# Altium PCB new.PcbDoc (part 1 of 2)
Units mil, origin at the board's own origin, x right, y up, seen from the top; angles counter-clockwise.
Board outline 2755.91 x 2755.91 mil, 4 copper layers (Top Layer, Power Plane, Ground Plane, Bottom Layer), stack 61.12 mil thick; 162 components, 148 nets, 888 pads, 434 vias.
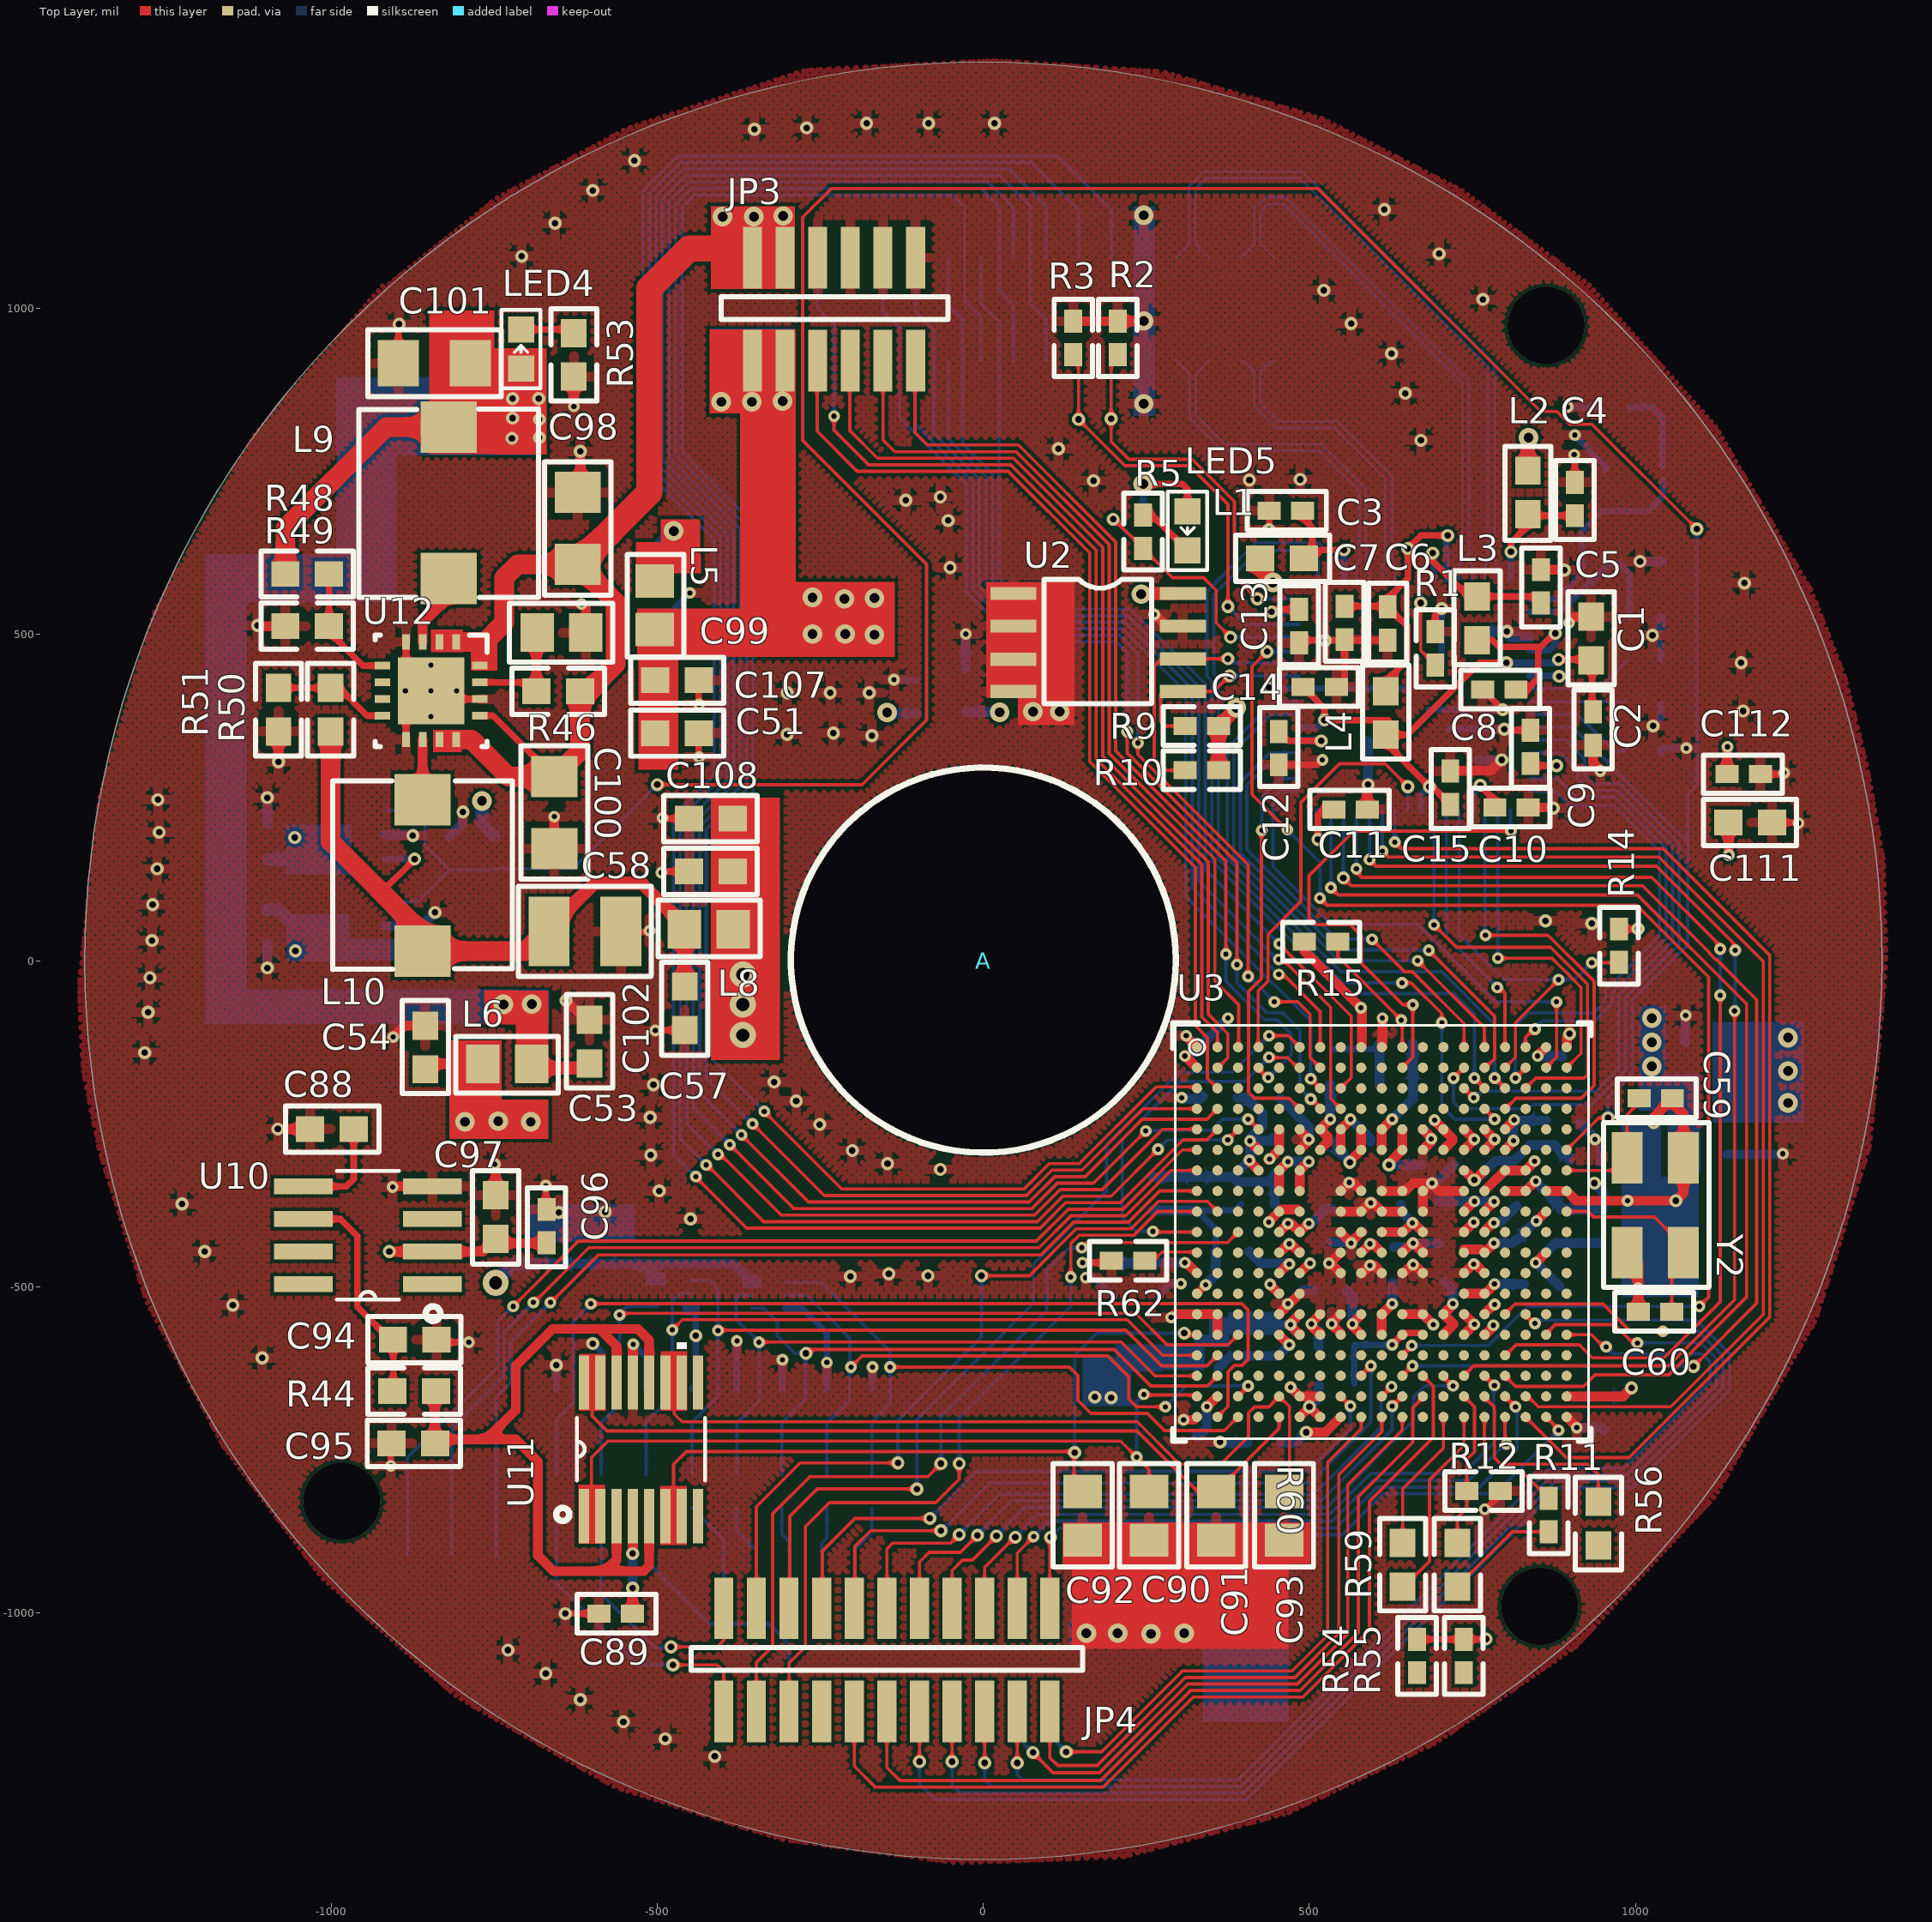
[diagram p0: Top Layer view]
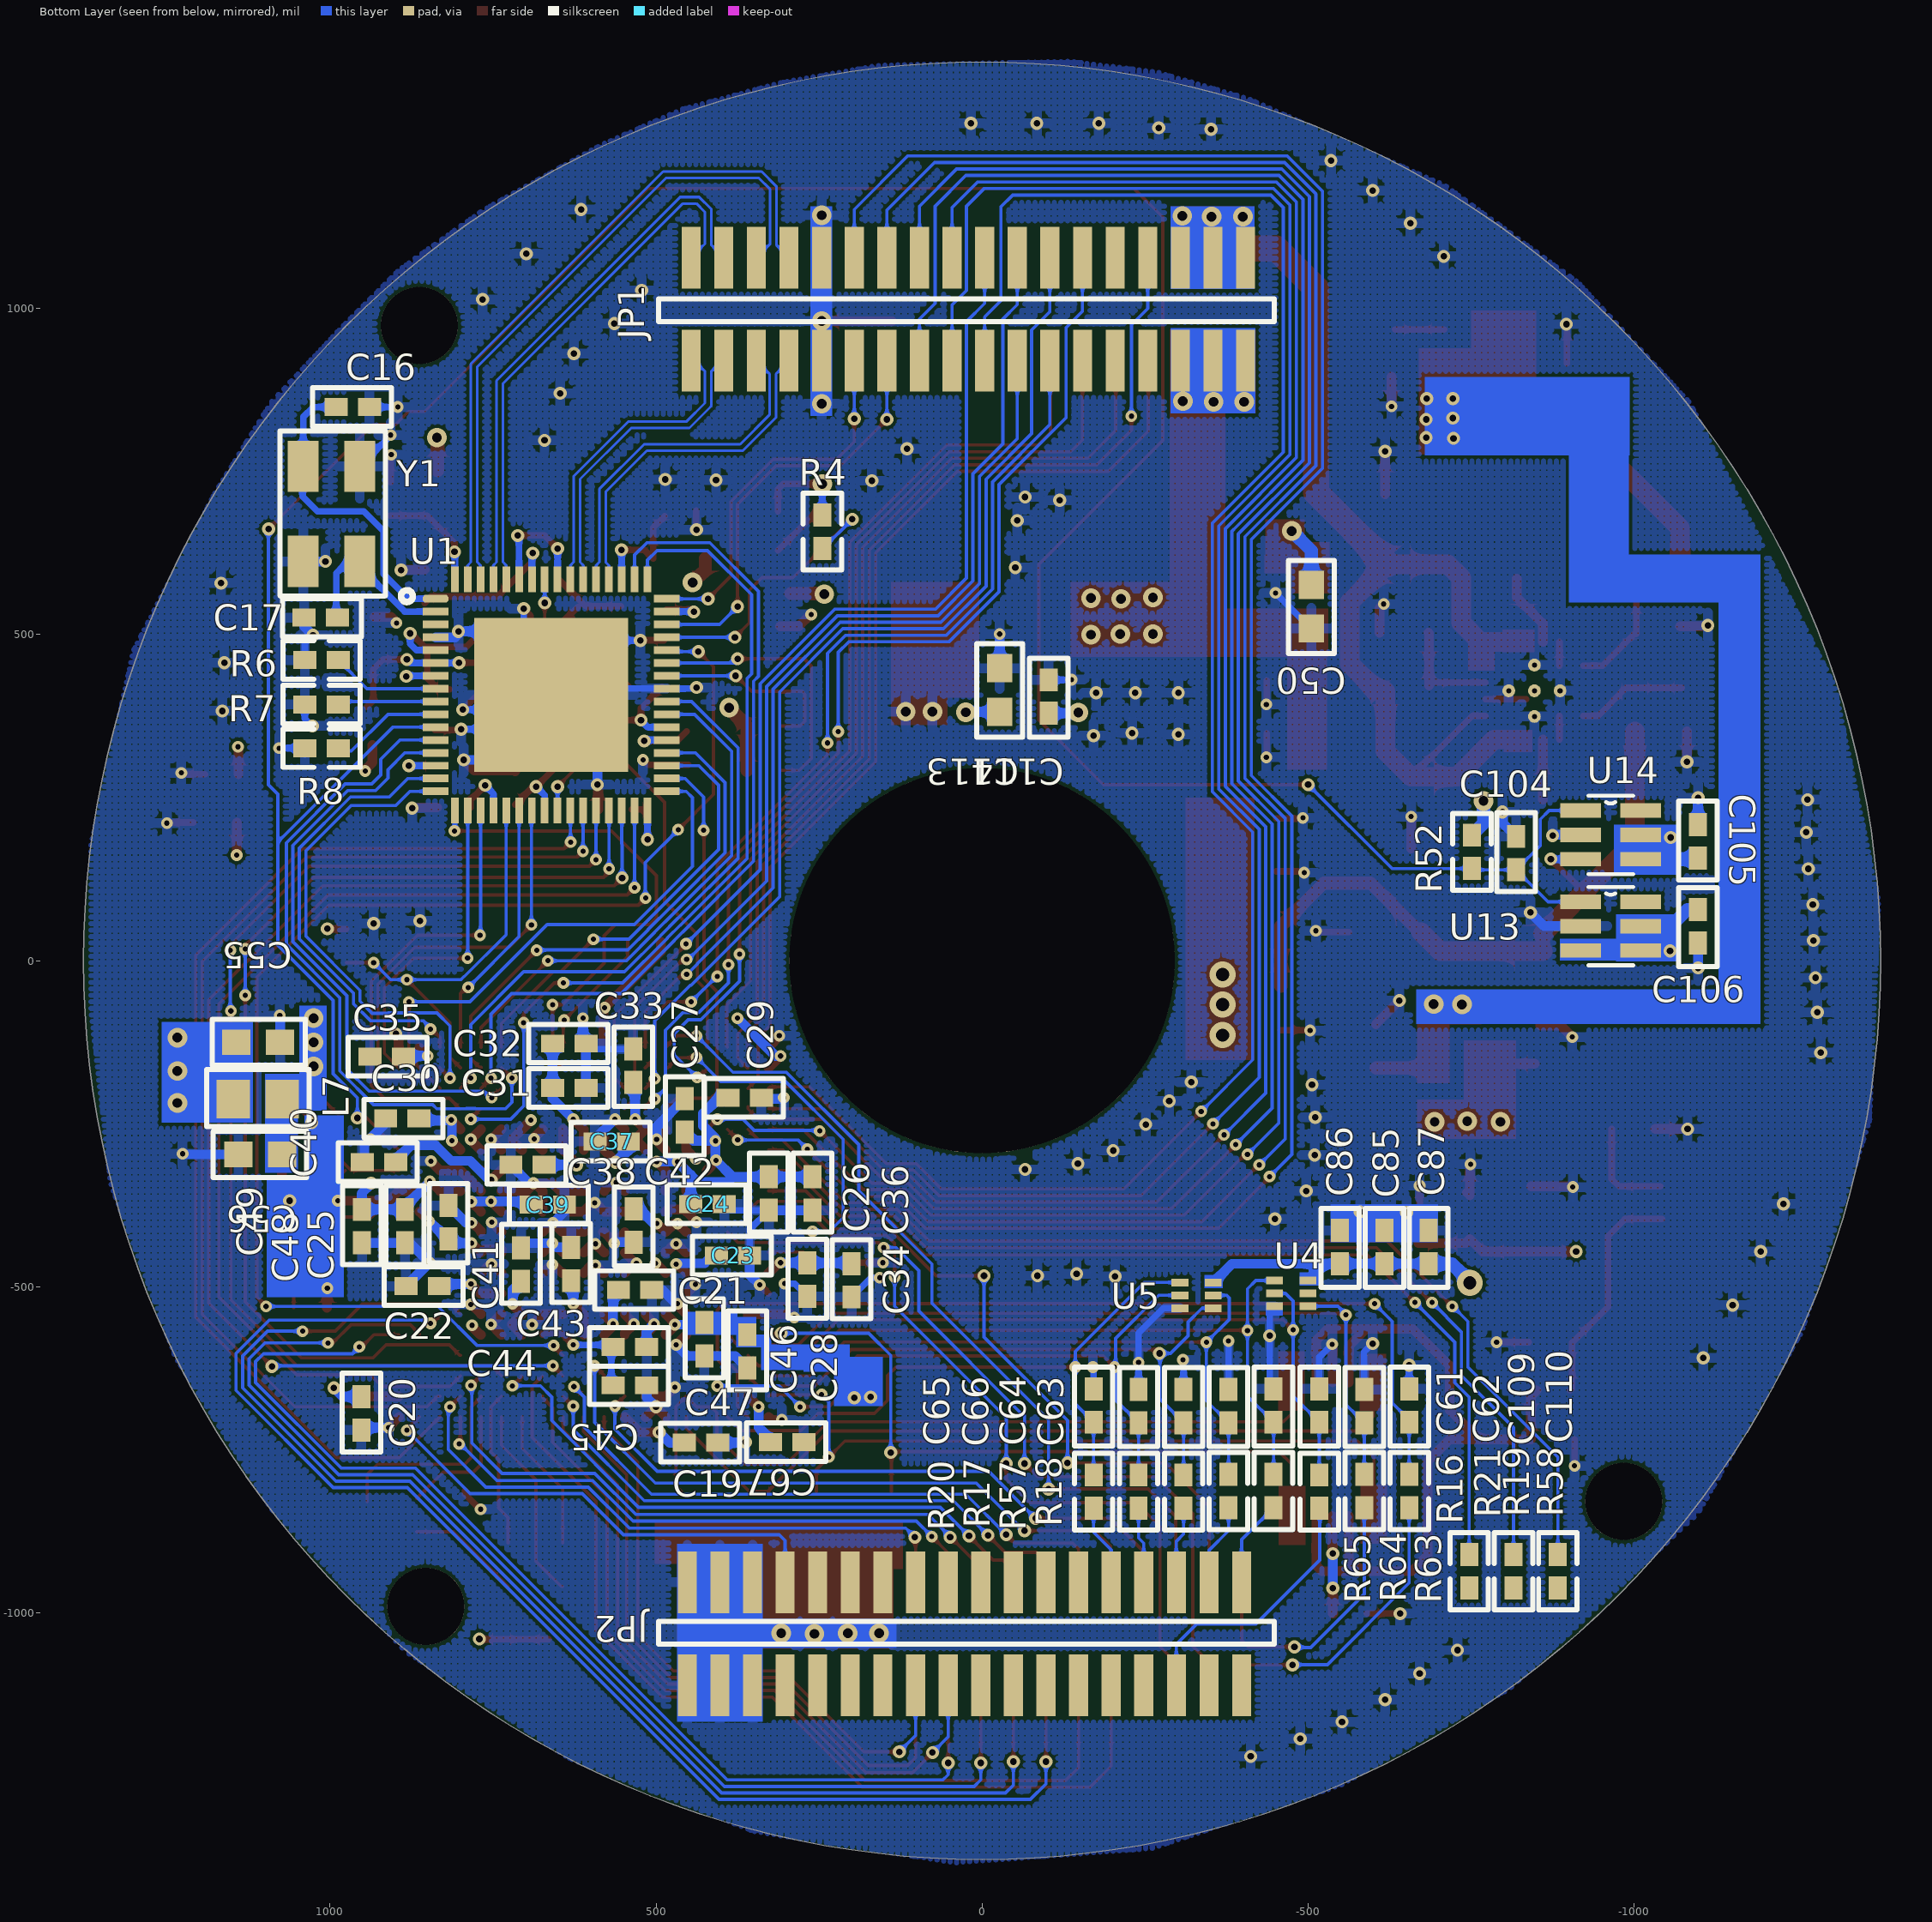
[diagram p1: Bottom Layer view, seen from below]
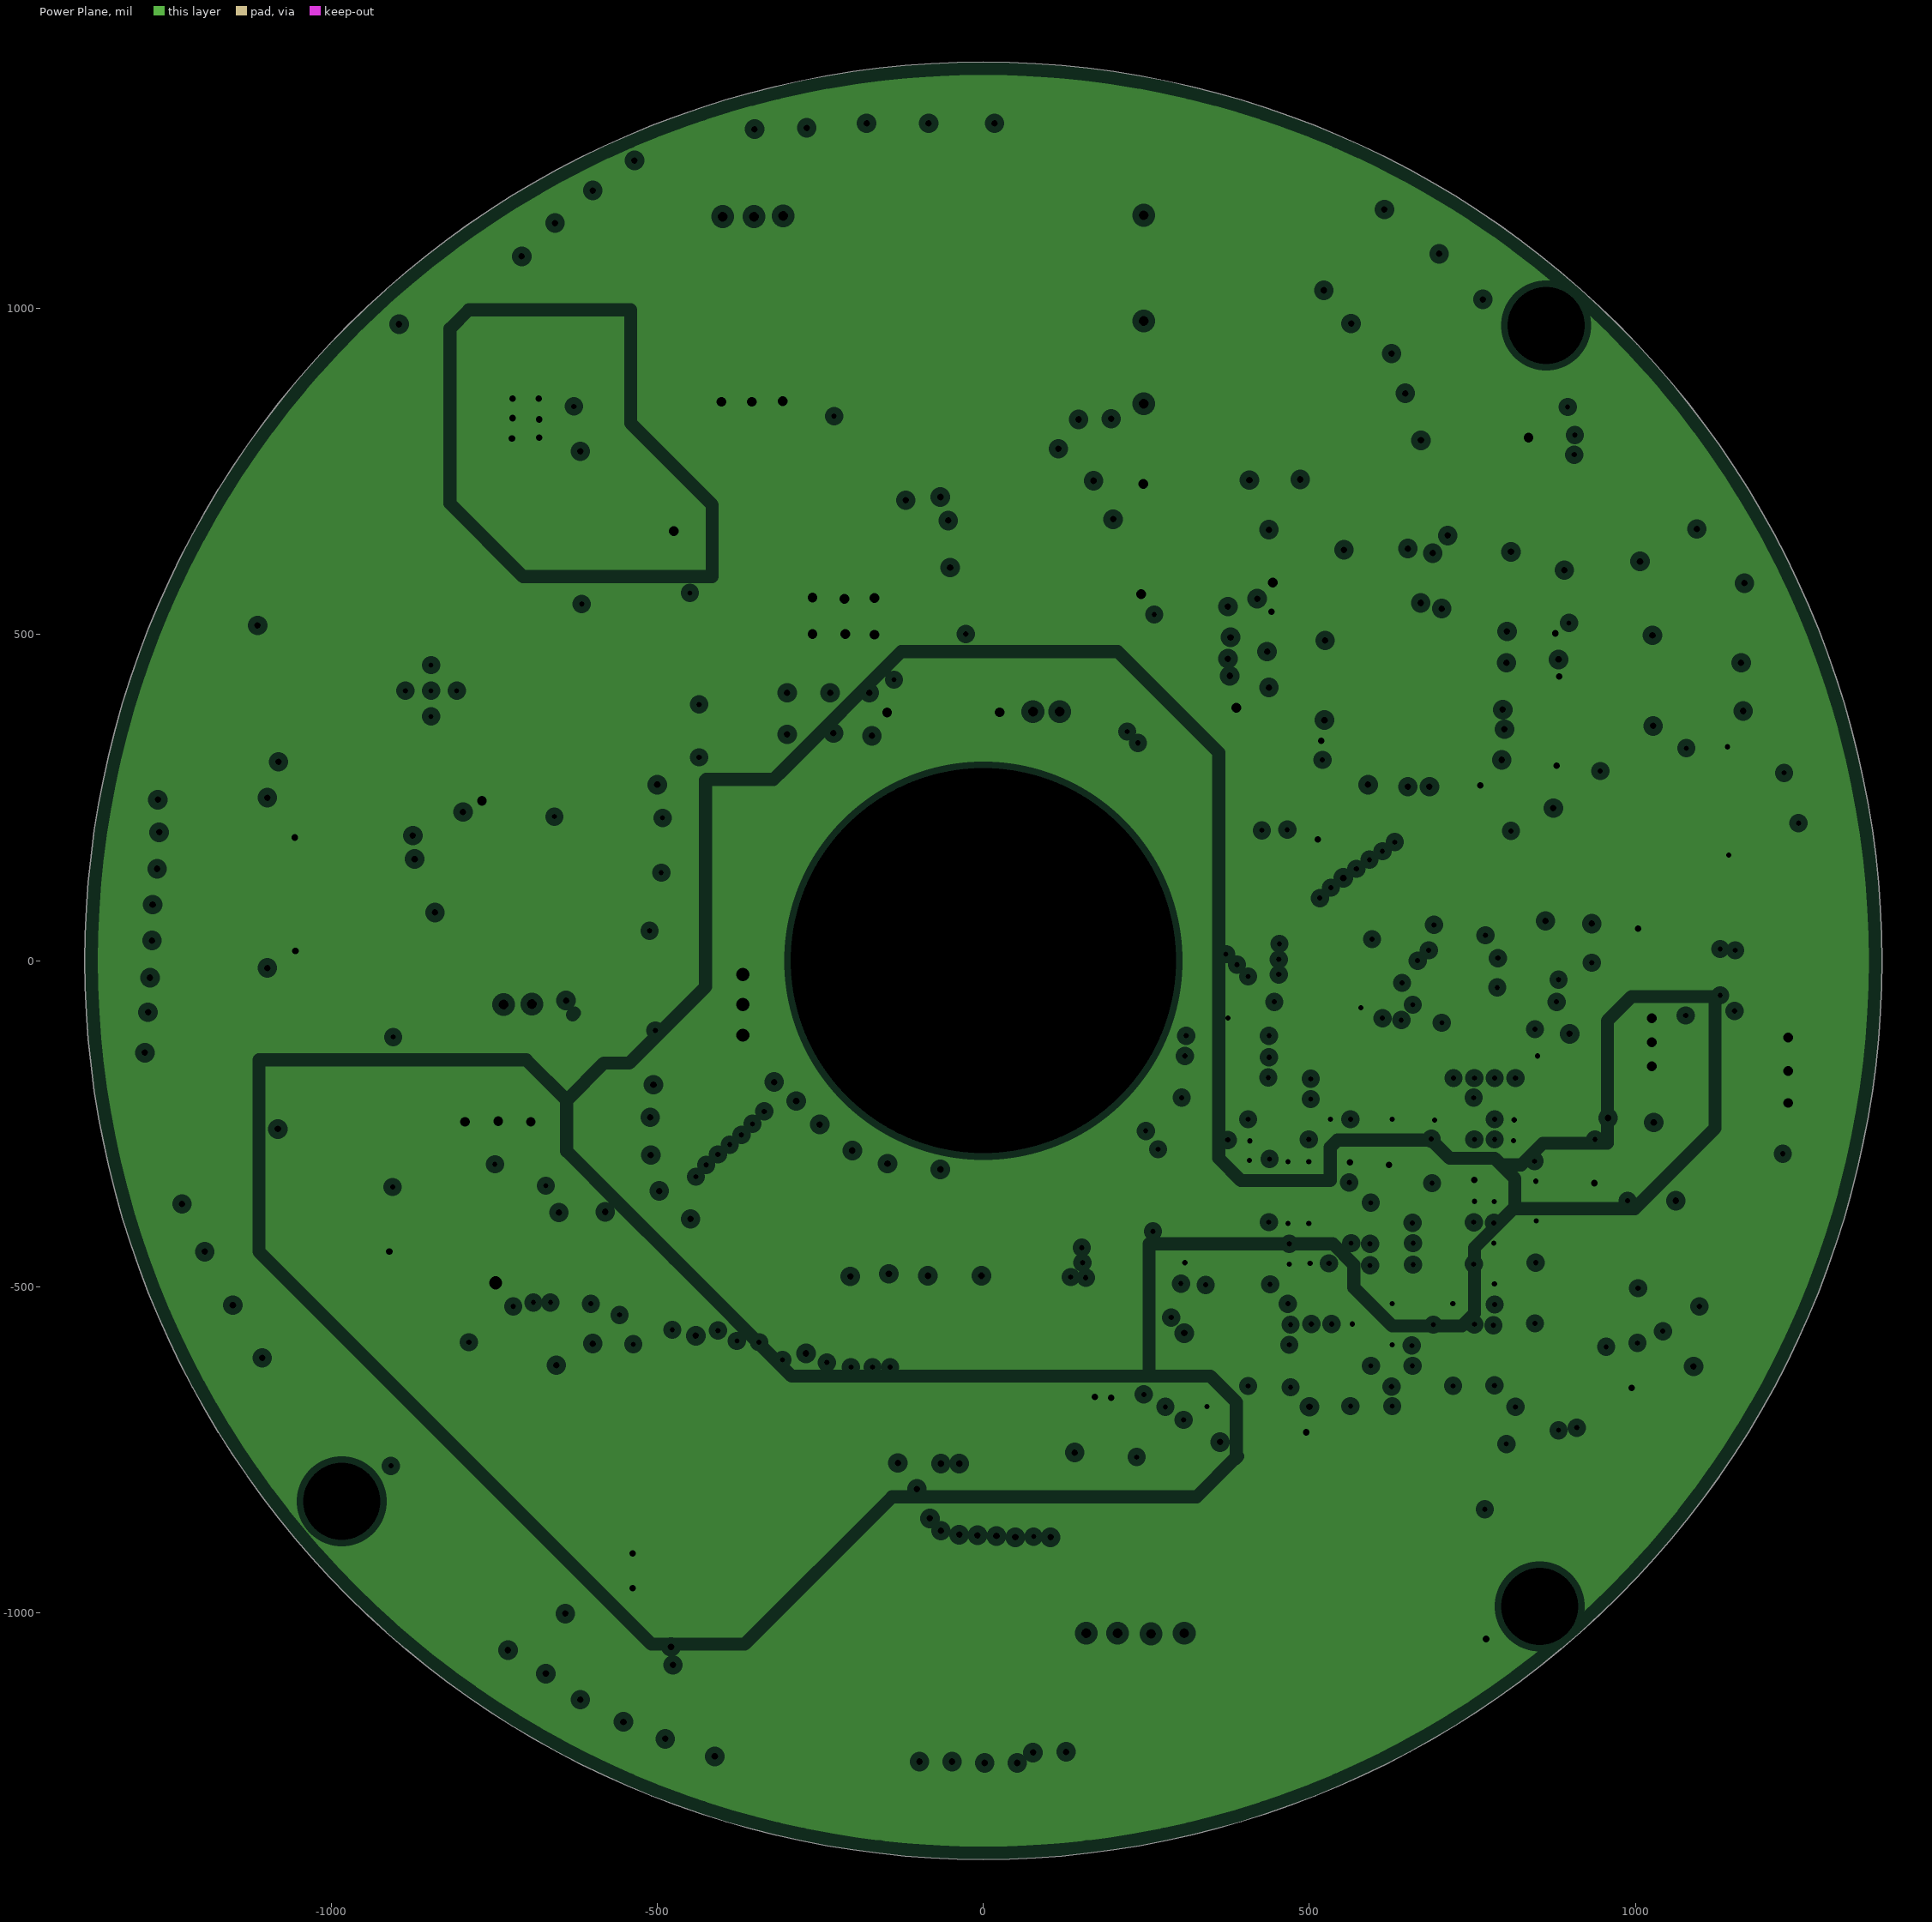
[diagram p2: Power Plane, clearances drawn from the general rule]
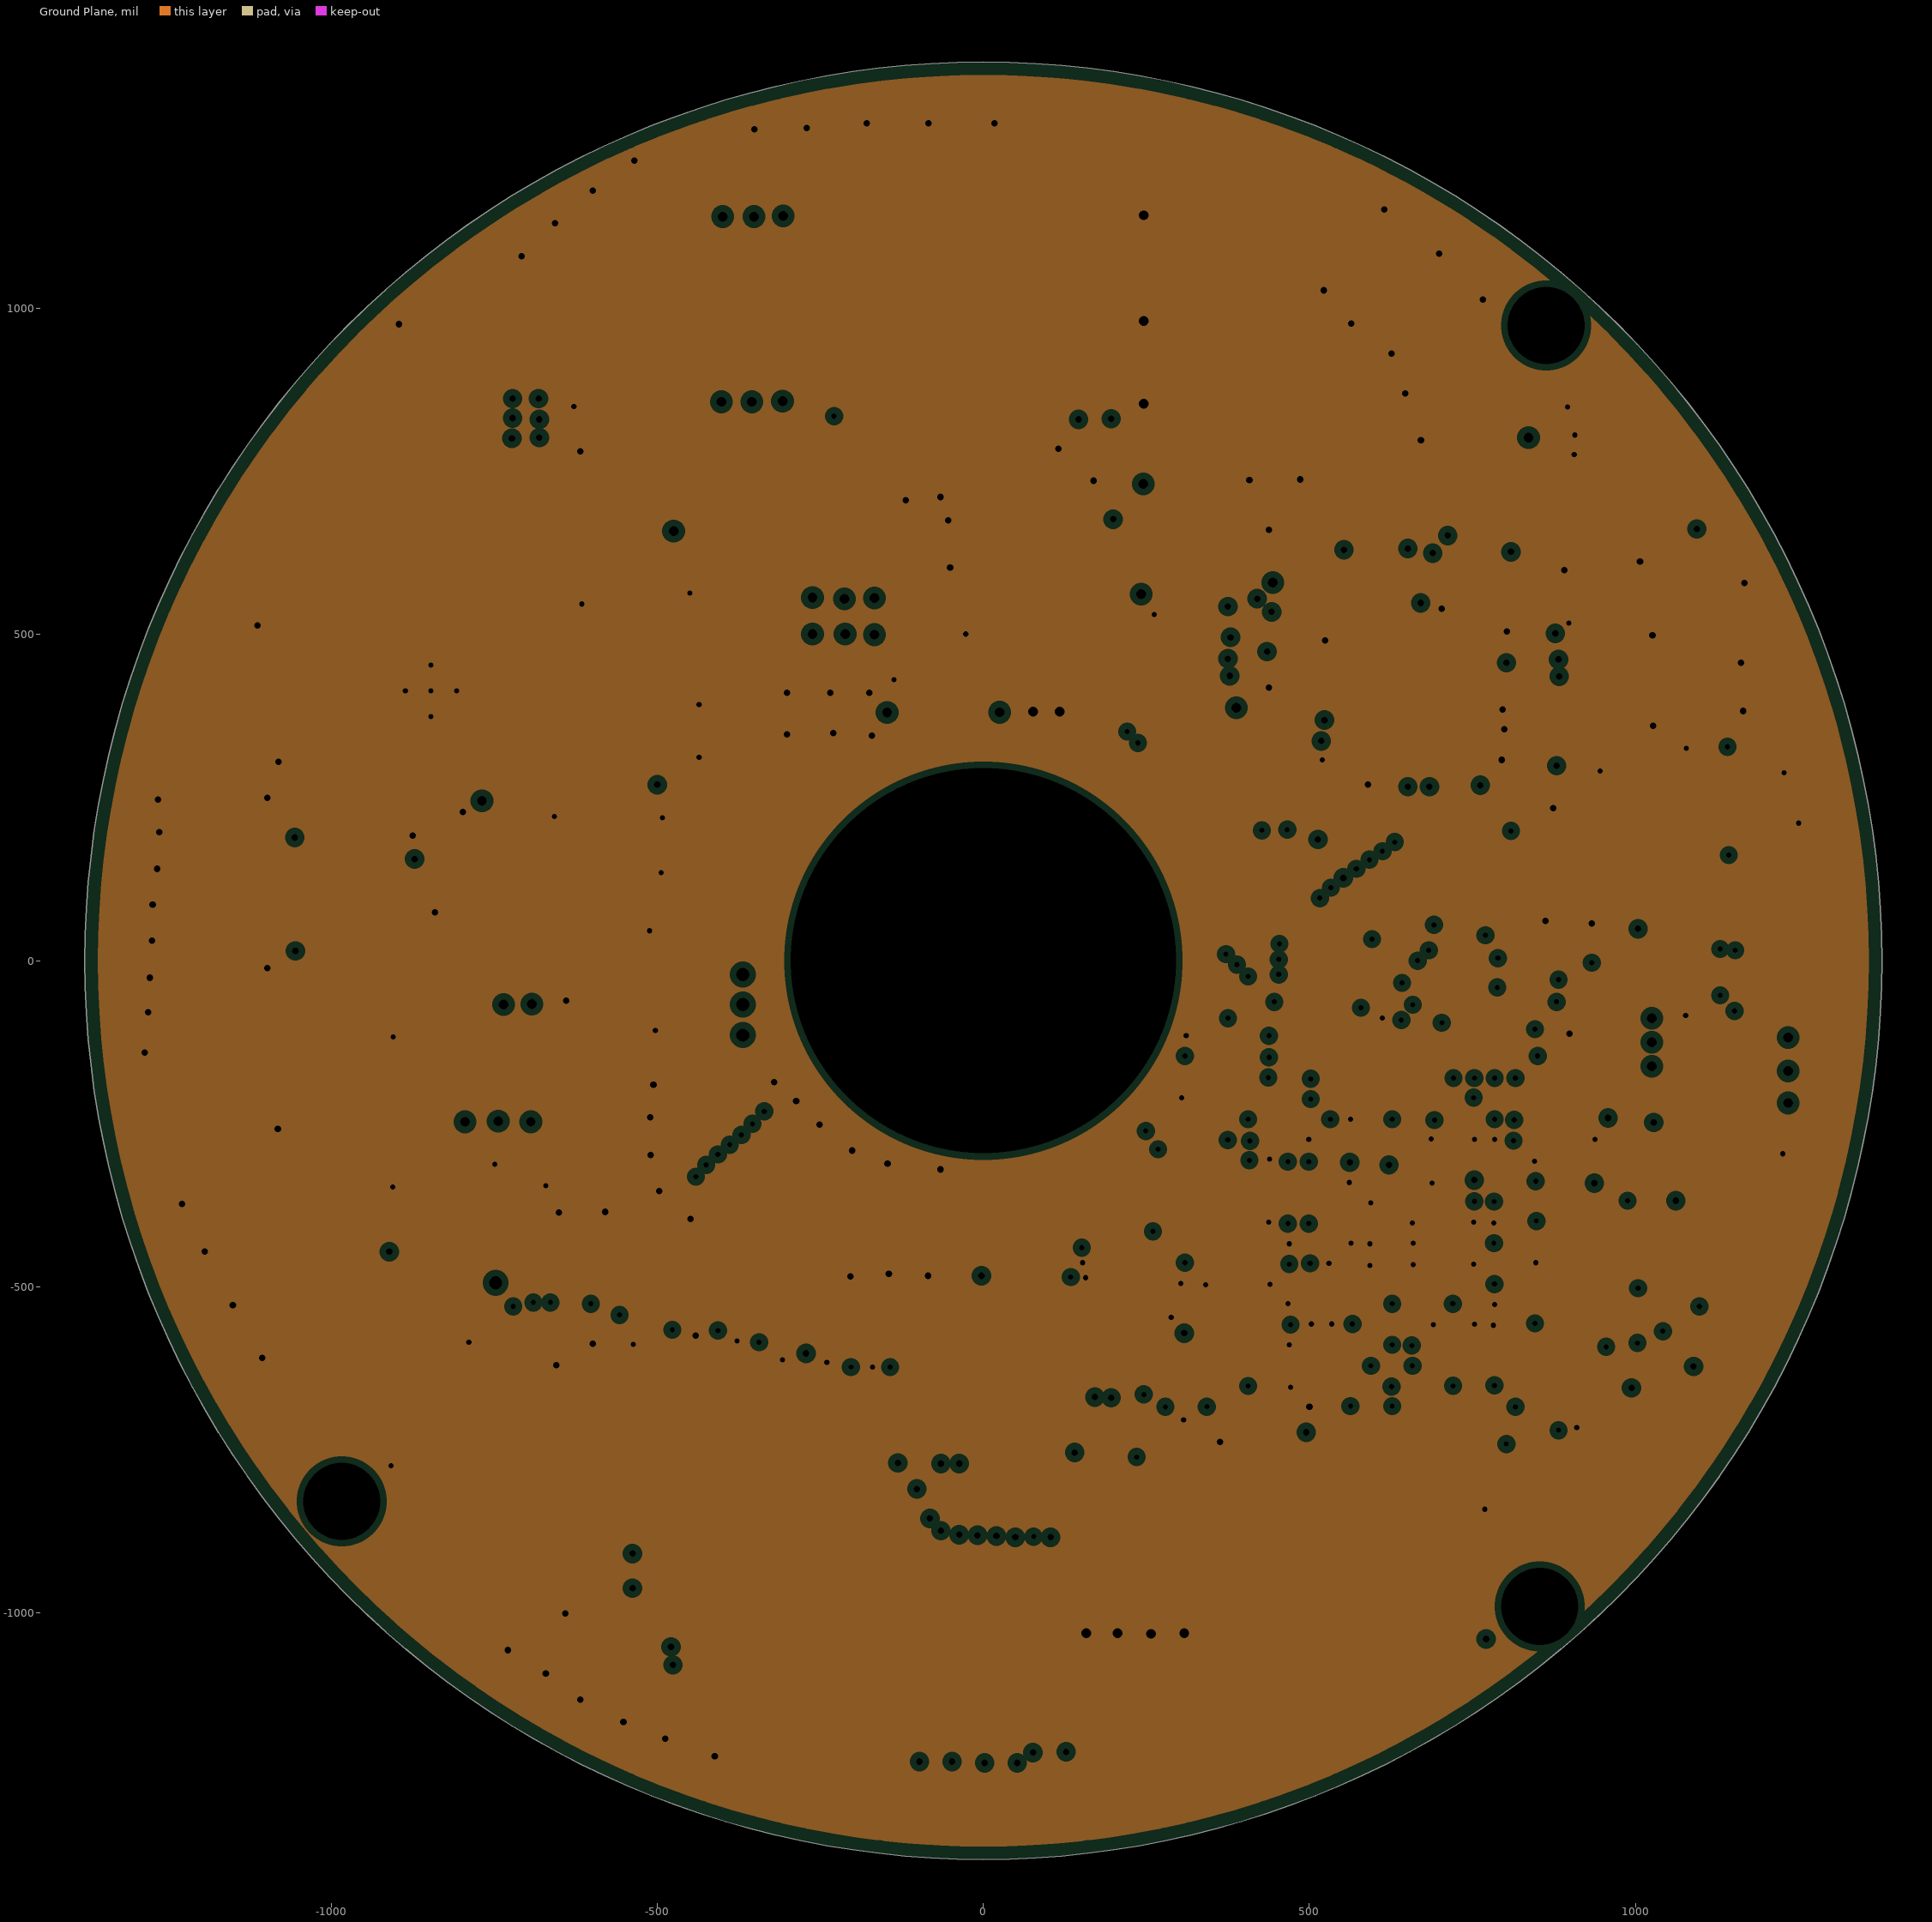
[diagram p3: Ground Plane, clearances drawn from the general rule]

## Layer stack, top to bottom
Top Solder: solder mask 0.4, Solder Resist, Dk 3.5
Top Layer: signal copper 1.65
Dielectric 1: core 3.5, FR-4, Dk 4.8
Power Plane: plane copper 1.2, net (Multiple Nets)
Dielectric 3: prepreg 48.42, FR-4, Dk 4.2
Ground Plane: plane copper 1.2, net GND
Dielectric 2: core 3.5, FR-4, Dk 4.2
Bottom Layer: signal copper 1.65
Bottom Solder: solder mask 0.4, Solder Resist, Dk 3.5

## Board outline
0,-1377.95 cw(c0,0) -1377.95,0 cw(c0,0) 0,1377.95 cw(c0,0) 1377.95,0 cw(c0,0)

## Design rules (kind name [scope] priority, off if disabled: settings)
Clearance [All] p1: gap=5
ComponentClearance [All] p1: gap=0 collisioncheckmode=3 verticalgap=0 showdistances=FALSE
DiffPairsRouting [All] p1: maxlimit=6 minlimit=6 mostfreqgap=6 toplayer_minwidth=4 toplayer_maxwidth=4 toplayer_prefwidth=4 bottomlayer_minwidth=4 bottomlayer_maxwidth=4 bottomlayer_prefwidth=4 maxuncoupledlength=500
HoleSize [All] p1: absolutevalues=TRUE maxlimit=590.55 minlimit=1 maxpercent=80.000 minpercent=20.000
HoleToHoleClearance [All] p1: gap=5 allowstackedmicrovias=TRUE
MinimumSolderMaskSliver [All] p1: minsoldermaskwidth=0
PlaneClearance [All] p1: clearance=10
PlaneConnect [All] p1: planeconnectstyle=Relief reliefexpansion=12 reliefentries=4 reliefconductorwidth=15 reliefairgap=10
PolygonConnect [All] p1: connectstyle=Relief reliefconductorwidth=15 reliefentries=4 polygonreliefangle="90 Angle" airgapwidth=10
RoutingVias [All] p1: holewidth=28 width=50 viastyle="Through Hole" minholewidth=8 minwidth=18 maxholewidth=25 maxwidth=50
SilkToSilkClearance [All] p1: silktosilkclearance=0
SilkToSolderMaskClearance [IsPad] p1: minsilkscreentomaskgap=0 clearancetoexposedcopper=TRUE
SolderMaskExpansion [All] p1: expansion=4
Width [All] p1: maxlimit=40 minlimit=5 preferedwidth=10
21 further rules are at their usual default settings.

## Classes and differential pairs
differential pair TXB: +TXB_P -TXB_N
differential pair TXA: +TXA_P -TXA_N
differential pair RXB: +RXB_P -RXB_N
differential pair RXA: +RXA_P -RXA_N

## Components (designator, comment, footprint, x,y, rotation, side; value= is the part's Value field where it differs from the comment)
A "circle" Circle 0,1 r90 top locked
C1 "0603B105J6R3NT" CC1608-0603 932,494 r90 top
C2 "0402B471J6R3NT" CC1005-0402 935,356 r270 top
C3 "0402B104J6R3NT" CC1005-0402 464,690 r0 top
C4 "0402B104J6R3NT" CC1005-0402 907.01,708.01 r270 top
C5 "0402B104J6R3NT" CC1005-0402 855,574 r270 top
C6 "0402B104J6R3NT" CC1005-0402 620.01,517.01 r90 top
C7 "0402B104J6R3NT" CC1005-0402 554.01,518.01 r90 top
C8 "0402B104J6R3NT" CC1005-0402 791.01,416.01 r0 top
C9 "0402B104J6R3NT" CC1005-0402 839.01,328.01 r270 top
C10 "0402B104J6R3NT" CC1005-0402 810.01,235.01 r180 top
C11 "0402B104J6R3NT" CC1005-0402 563.01,232.01 r180 top
C12 "0402B104J6R3NT" CC1005-0402 453.01,326.01 r90 top
C13 "0402B104J6R3NT" CC1005-0402 484.01,513.01 r90 top
C14 "0402B104J6R3NT" CC1005-0402 516.01,420.01 r180 top
C15 "0402B104J6R3NT" CC1005-0402 716.01,265.01 r270 top
C16 "0402B180J6R3NT" CC1005-0402 965,849 r0 bottom
C17 "0402B180J6R3NT" CC1005-0402 1014,526 r180 bottom
C19 "0402B104J6R3NT" CC1005-0402 431,-739 r0 bottom
C20 "0402B104J6R3NT" CC1005-0402 952.01,-693.99 r90 bottom
C21 "0402B104J6R3NT" CC1005-0402 532.01,-504.99 r0 bottom
C22 "0402B104J6R3NT" CC1005-0402 858,-499 r180 bottom
C23 "0402B104J6R3NT" CC1005-0402 382,-452 r0 bottom
C24 "0402B104J6R3NT" CC1005-0402 421,-373 r0 bottom
C25 "0402B104J6R3NT" CC1005-0402 818.01,-400.99 r270 bottom
C26 "0402B104J6R3NT" CC1005-0402 327,-357 r90 bottom
C27 "0402B104J6R3NT" CC1005-0402 456.01,-236.99 r270 bottom
C28 "0402B104J6R3NT" CC1005-0402 268,-489 r90 bottom
C29 "0402B104J6R3NT" CC1005-0402 364,-210 r0 bottom
C30 "0402B104J6R3NT" CC1005-0402 889,-242 r180 bottom
C31 "0402B104J6R3NT" CC1005-0402 633,-195 r0 bottom
C32 "0402B104J6R3NT" CC1005-0402 633.01,-126.99 r0 bottom
C33 "0402B104J6R3NT" CC1005-0402 535,-161 r270 bottom
C34 "0402B104J6R3NT" CC1005-0402 200,-490 r90 bottom
C35 "0402B104J6R3NT" CC1005-0402 913,-147 r180 bottom
C36 "0402B104J6R3NT" CC1005-0402 260,-357 r90 bottom
C37 "0402B104J6R3NT" CC1005-0402 568,-277 r0 bottom
C38 "0402B104J6R3NT" CC1005-0402 697,-313 r0 bottom
C39 "0402B104J6R3NT" CC1005-0402 666.01,-373.99 r180 bottom
C40 "0402B104J6R3NT" CC1005-0402 925.01,-308.99 r0 bottom
C41 "0402B104J6R3NT" CC1005-0402 707.01,-465.99 r90 bottom
C42 "0402B104J6R3NT" CC1005-0402 534.01,-405.99 r270 bottom
C43 "0402B104J6R3NT" CC1005-0402 630.01,-464.99 r90 bottom
C44 "0402B104J6R3NT" CC1005-0402 540.01,-591.99 r0 bottom
C45 "0402B104J6R3NT" CC1005-0402 540.01,-650.99 r0 bottom
C46 "0402B104J6R3NT" CC1005-0402 360,-599 r90 bottom
C47 "0402B104J6R3NT" CC1005-0402 426.01,-580.4 r90 bottom
C48 "0402B104J6R3NT" CC1005-0402 885.01,-406.99 r90 bottom
C49 "0402B104J6R3NT" CC1005-0402 951,-407 r90 bottom
C50 "0603B106J6R3NT" CC1608-0603 -505,543 r270 bottom
C51 "0603B106J6R3NT" CC1608-0603 -470,349 r0 top
C53 "0603B225J6R3NT" CC1608-0603 -604,-124 r90 top
C54 "0603B225J6R3NT" CC1608-0603 -856,-133 r90 top
C55 "0603B225J6R3NT" CC1608-0603 1110,-125 r180 bottom
C56 "0603B225J6R3NT" CC1608-0603 1107,-297 r0 bottom
C57 "0603B106J6R3NT" CC1608-0603 -458,-73 r270 top
C58 "0603B106J6R3NT" CC1608-0603 -417.99,136.99 r180 top
C59 "0402B150J6R3NT" CC1005-0402 1031,-211 r0 top
C60 "0402B150J6R3NT" CC1005-0402 1030,-538 r180 top
C61 "0402B104J6R3NT" CC1005-0402 -447,-682 r270 bottom
C62 "0402B104J6R3NT" CC1005-0402 -517,-682 r270 bottom
C63 "0402B104J6R3NT" CC1005-0402 -378,-683 r270 bottom
C64 "0402B104J6R3NT" CC1005-0402 -309,-683 r270 bottom
C65 "0402B104J6R3NT" CC1005-0402 -171,-682 r270 bottom
C66 "0402B104J6R3NT" CC1005-0402 -240,-683 r270 bottom
C67 "0402B104J6R3NT" CC1005-0402 299,-738 r0 bottom
C85 "0402B104J6R3NT" CC1005-0402 -617,-439 r270 bottom
C86 "0402B104J6R3NT" CC1005-0402 -549,-439 r270 bottom
C87 "0402B104J6R3NT" CC1005-0402 -685,-439 r270 bottom
C88 "0603B105J6R3NT" CC1608-0603 -999,-258 r0 top
C89 "0402B104J6R3NT" CC1005-0402 -564,-1001 r0 top
C90 "0805B226J6R3NT" CC2012-0805 254,-851 r90 top
C91 "0805B226J6R3NT" CC2012-0805 357,-851 r90 top
C92 "0805B226J6R3NT" CC2012-0805 152,-851 r90 top
C93 "0805B226J6R3NT" CC2012-0805 461,-851 r90 top
C94 "0603B105J6R3NT" CC1608-0603 -872,-581 r180 top
C95 "0603B105J6R3NT" CC1608-0603 -874,-740 r0 top
C96 "0402B104J6R3NT" CC1005-0402 -670,-407 r270 top
C97 "0603B225J6R3NT" CC1608-0603 -748,-393 r270 top
C98 "1206B156J6R3NT" CC3216-1206 -622,663 r90 top
C99 "0805B474J6R3NT" CC2012-0805 -646.99,503.01 r180 top
C100 "1206B156J6R3NT" CC3216-1206 -657.99,227.01 r270 top
C101 "1206B226J6R3NT" CC3216-1206 -842,916 r180 top
C102 "1206B336J6R3NT" CC3225-1210 -611,45 r0 top
C104 "0402B103J6R3NT" CC1005-0402 -819,165 r90 bottom
C105 "0402B104J6R3NT" CC1005-0402 -1098,183 r90 bottom
C106 "0402B104J6R3NT" CC1005-0402 -1098,53 r270 bottom
C107 "0603B106J6R3NT" CC1608-0603 -470,430 r0 top
C108 "0603B106J6R3NT" CC1608-0603 -418,218 r180 top
C109 "0402B104J6R3NT" CC1005-0402 -586,-683 r270 bottom
C110 "0402B104J6R3NT" CC1005-0402 -655,-682 r270 bottom
C111 "0603B106J6R3NT" CC1608-0603 1176,212 r180 top
C112 "0402B104J6R3NT" CC1005-0402 1166,286 r180 top
C113 "0603B106J6R3NT" CC1608-0603 -27,415 r270 bottom
C114 "0402B104J6R3NT" CC1005-0402 -102,405 r270 bottom
JP1 "Header 18X2" DC_1.27_36 446,920 r0 bottom locked
JP2 "Header 18X2" DC_1.27_36 -398,-953 r180 bottom locked
JP3 "Header 6X2" DC_1.27_12 -104,1078 r0 top locked
JP4 "Header 11X2" DC_1.27_22 102,-993 r0 top locked
L1 "BLM18EG221SN1D" BLM0603 458,617 r0 top
L2 "BLM18EG221SN1D" BLM0603 835,718 r270 top
L3 "BLM18EG221SN1D" BLM0603 757,525 r90 top
L4 "BLM18EG221SN1D" BLM0603 617,380 r90 top
L5 "BLM21PG221SN1D" BLM0805 -504,545 r270 top
L6 "BLM21PG600SN1D" BLM0805 -730,-158 r180 top
L7 "BLM21PG600SN1D" BLM0805 1111,-212 r180 bottom
L8 "BLM21PG221SN1D" BLM0805 -421,48 r0 top
L9 "RLF7030T-1R0M6R4" RLF7030T -819.99,586.01 r90 top
L10 "RLF7030T-1R0M6R4" RLF7030T -859.99,247.01 r270 top
LED4 "LED Chip" 0603D -709,908 r90 top
LED5 "LED Chip" 0603D 313,689 r270 top
R1 "RC02K1212JT" CR1005-0402 693,479 r270 top
R2 "RC02K6103JT" CR1005-0402 206,955 r90 top
R3 "RC02K6103JT" CR1005-0402 138,955 r90 top
R4 "RC02K6103JT" CR1005-0402 245,658 r90 bottom
R5 "RC02K6103JT" CR1005-0402 245,658 r90 top
R6 "RC02K6103JT" CR1005-0402 1013.01,461.01 r0 bottom
R7 "RC02K6103JT" CR1005-0402 1013,393 r0 bottom
R8 "RC02K6103JT" CR1005-0402 1013,326 r0 bottom
R9 "RC02K202JT" CR1005-0402 335,360 r0 top
R10 "RC02K202JT" CR1005-0402 335,292 r0 top
R11 "RC02K390JT" CR1005-0402 867,-850 r90 top
R12 "RC02K222JT" CR1005-0402 767,-813 r180 top
R14 "RC02K563JT" CR1005-0402 975,23 r270 top
R15 "RC02K563JT" CR1005-0402 518,29 r0 top
R16 "RC02K000JT" CR1005-0402 -447,-813 r90 bottom
R17 "RC02K000JT" CR1005-0402 -240,-814 r90 bottom
R18 "RC02K000JT" CR1005-0402 -378,-813 r90 bottom
R19 "RC02K000JT" CR1005-0402 -586,-813 r90 bottom
R20 "RC02K000JT" CR1005-0402 -171,-814 r90 bottom
R21 "RC02K000JT" CR1005-0402 -517,-814 r90 bottom
R44 "RC02K102JT" CR1608-0603 -873,-660 r0 top
R46 "RC03K4R99JT" CR1608-0603 -652,413 r180 top
R48 "RC03K3162JT" CR1608-0603 -1037,593 r180 top
R49 "RC03K103JT" CR1608-0603 -1037,513 r180 top
R50 "RC03K4991JT" CR1608-0603 -1000.99,385.01 r270 top
R51 "RC03K103JT" CR1608-0603 -1081,385 r270 top
R52 "RC02K222JT" CR1005-0402 -751,167 r90 bottom
R53 "RC03K331JT" CR1608-0603 -628,929 r90 top
R54 "RC02K472JT" CR1005-0402 665,-1066 r90 top
R55 "RC02K472JT" CR1005-0402 737,-1066 r270 top
R56 "RC02K220JT" CR1608-0603 943,-863 r90 top
R57 "RC02K000JT" CR1005-0402 -309,-814 r90 bottom
R58 "RC02K000JT" CR1005-0402 -655,-813 r90 bottom
R59 "RC02K220JT" CR1608-0603 643,-926 r90 top
R60 "RC02K220JT" CR1608-0603 727,-926 r270 top
R62 "RC02K000JT" CR1005-0402 222,-460 r0 top
R63 "RC02K000JT" CR1005-0402 -883,-936 r90 bottom
R64 "RC02K000JT" CR1005-0402 -815,-936 r90 bottom
R65 "RC02K000JT" CR1005-0402 -747,-936 r90 bottom
U1 "LAN9252" LAN9252 838.01,555.01 r180 bottom
U2 "24LC16B" 24FC512 46,563 r0 top
U3 "TMS320F28377DZWT" TMS320F28377D 611.01,-415.99 r0 top locked
U4 "TPD4E001_DRL_6" TPD4E001 -474,-510 r180 bottom
U5 "TPD4E001_DRL_6" TPD4E001 -329,-513 r180 bottom
U10 "REF5030_D_8" REF5030 -944,-421 r180 top
U11 "OPA4350_DBQ_16" OPA4350 -525,-749 r90 top
U12 "LM26420Q1" LM26420 -847,414 r270 top
U13 "TPS3702CX33DDCR" TPS3702 -964,53 r180 bottom
U14 "TPS3702CX33DDCR" TPS3702 -964,193 r180 bottom
Y1 "25MHz" 7B-20MHz 1041,758 r270 bottom
Y2 "XTAL1" 7B-20MHz 987.01,-301.99 r270 top

## Footprints (in the part's own frame and the unit in brackets; to place one, negate y for a bottom-side part, rotate by r counter-clockwise, add the part's x,y. Pads: shape width x height; smd on the part's side, far side on the other; paste and mask are expansions set on the pad)
7B-20MHz [mm]
  rect 2x1.2 smd: 1(0,0) 2(3.7,0) 3(3.7,2.2) 4(0,2.2)
  silkscreen extent -1.37,-0.91 5.05,3.2
24FC512 [mm]
  rect 1.8x0.51 smd: 1(0,0) 2(0,-1.27) 3(0,-2.56) 4(0,-3.81) 5(6.6,-3.81) 6(6.6,-2.54) 7(6.6,-1.27) 8(6.6,0)
  silkscreen extent 1.19,-4.29 5.38,0.56
0603D [mil]
  rect 40x40 smd: 1(0,0) 2(60,0)
  silkscreen extent -30,-30 90,30
BLM0603 [mm]
  rect 1.1x1 smd: 1(-0.85,0) 2(0.85,0)
  silkscreen extent -1.8,-0.9 1.86,0.9
BLM0805 [mm]
  rect 1.3x1.5 smd: 1(-0.95,0) 2(0.95,0)
  silkscreen extent -1.98,-1.07 2.01,1.14
CC1005-0402 [mm]
  rect 0.9x0.7 smd: 1(-0.65,0) 2(0.65,0)
  silkscreen extent -1.5,-0.75 1.57,0.75
CC1608-0603 [mm]
  rect 1.1x1 smd: 1(-0.85,0) 2(0.85,0)
  silkscreen extent -1.8,-0.9 1.83,0.9
CC2012-0805 [mm]
  rect 1.3x1.5 smd: 1(-0.95,0) 2(0.95,0)
  silkscreen extent -2,-1.15 2.03,1.15
CC3216-1206 [mm]
  rect 1.6x1.8 smd: 1(-1.4,0) 2(1.4,0)
  silkscreen extent -2.6,-1.3 2.59,1.3
CC3225-1210 [mm]
  rect 1.6x2.7 smd: 1(-1.4,0) 2(1.4,0)
  silkscreen extent -2.6,-1.75 2.59,1.75
Circle [mm]
  round 15 hole 15: 0(-0.025,0)
  silkscreen extent -7.5,-7.5 7.5,7.5
CR1005-0402 [mm]
  rect 0.9x0.7 smd: 1(-0.65,0) 2(0.65,0)
  silkscreen extent -1.5,-0.75 1.5,0.75
CR1608-0603 [mm]
  rect 1.1x1 smd: 1(-0.85,0) 2(0.85,0)
  silkscreen extent -1.8,-0.9 1.8,0.9
DC_1.27_12 [mm]
  rect 0.74x2.4 smd: 1(0,0) 2(0,-4.013) 3(-1.27,0) 4(-1.27,-4.013) 5(-2.54,0) 6(-2.54,-4.013) 7(-3.81,0) 8(-3.81,-4.013) 9(-5.08,0) 10(-5.08,-4.013) 11(-6.35,0) 12(-6.35,-4.013)
  silkscreen extent -7.57,-2.41 1.27,-1.52
DC_1.27_22 [mm]
  rect 0.74x2.4 smd: 1(0,0) 2(0,-4.013) 3(-1.27,0) 4(-1.27,-4.013) 5(-2.54,0) 6(-2.54,-4.013) 7(-3.81,0) 8(-3.81,-4.013) 9(-5.08,0) 10(-5.08,-4.013) 11(-6.35,0) 12(-6.35,-4.013) 13(-7.62,0) 14(-7.62,-4.013) 15(-8.89,0) 16(-8.89,-4.013) 17(-10.16,0) 18(-10.16,-4.013) 19(-11.43,0) 20(-11.43,-4.013) 21(-12.7,0) 22(-12.7,-4.013)
  silkscreen extent -13.97,-2.41 1.27,-1.52
DC_1.27_36 [mm]
  rect 0.74x2.4 smd: 1(0,0) 2(0,-4.013) 3(-1.27,0) 4(-1.27,-4.013) 5(-2.54,0) 6(-2.54,-4.013) 7(-3.81,0) 8(-3.81,-4.013) 9(-5.08,0) 10(-5.08,-4.013) 11(-6.35,0) 12(-6.35,-4.013) 13(-7.62,0) 14(-7.62,-4.013) 15(-8.89,0) 16(-8.89,-4.013) 17(-10.16,0) 18(-10.16,-4.013) 19(-11.43,0) 20(-11.43,-4.013) 21(-12.7,0) 22(-12.7,-4.013) 23(-13.97,0) 24(-13.97,-4.013) 25(-15.24,0) 26(-15.24,-4.013) 27(-16.51,0) 28(-16.51,-4.013) 29(-17.78,0) 30(-17.78,-4.013) 31(-19.05,0) 32(-19.05,-4.013) 33(-20.32,0) 34(-20.32,-4.013) 35(-21.59,0) 36(-21.59,-4.013)
  silkscreen extent -22.71,-2.41 1.27,-1.52
LAN9252 [mm]
  oct 1x0.3 smd: 1(0,0)
  rect 1x0.3 smd: 2(0,-0.5) 3(0,-1) 4(0,-1.5) 5(0,-2) 6(0,-2.5) 7(0,-3) 8(0,-3.5) 9(0,-4) 10(0,-4.5) 11(0,-5) 12(0,-5.5) 13(0,-6) 14(0,-6.5) 15(0,-7) 16(0,-7.5) 33(9,-7.5) 34(9,-7) 35(9,-6.5) 36(9,-6) 37(9,-5.5) 38(9,-5) 39(9,-4.5) 40(9,-4) 41(9,-3.5) 42(9,-3) 43(9,-2.5) 44(9,-2) 45(9,-1.5) 46(9,-1) 47(9,-0.5) 48(9,0)
  rect 0.3x1 smd: 17(0.75,-8.25) 18(1.25,-8.25) 19(1.75,-8.25) 20(2.25,-8.25) 21(2.75,-8.25) 22(3.25,-8.25) 23(3.75,-8.25) 24(4.25,-8.25) 25(4.75,-8.25) 26(5.25,-8.25) 27(5.75,-8.25) 28(6.25,-8.25) 29(6.75,-8.25) 30(7.25,-8.25) 31(7.75,-8.25) 32(8.25,-8.25) 49(8.25,0.75) 50(7.75,0.75) 51(7.25,0.75) 52(6.75,0.75) 53(6.25,0.75) 54(5.75,0.75) 55(5.25,0.75) 56(4.75,0.75) 57(4.25,0.75) 58(3.75,0.75) 59(3.25,0.75) 60(2.75,0.75) 61(2.25,0.75) 62(1.75,0.75) 63(1.25,0.75) 64(0.75,0.75)
  rect 6x6 smd: 65(4.5,-3.75)
  silkscreen extent -1.35,-0.13 -0.89,0.33
LM26420 [mm]
  rect 0.6x0.3 smd paste-0.102 mask+0.051: 1(-1.9,0.975) 2(-1.9,0.325) 3(-1.9,-0.325) 4(-1.9,-0.975) 9(1.9,-0.975) 10(1.9,-0.325) 11(1.9,0.325) 12(1.9,0.975)
  rect 0.3x0.6 smd paste-0.102 mask+0.051: 5(-0.975,-1.9) 6(-0.325,-1.9) 7(0.325,-1.9) 8(0.975,-1.9) 13(0.975,1.9) 14(0.325,1.9) 15(-0.325,1.9) 16(-0.975,1.9)
  round 0.5 / inner round 1.524 / far side round 0.5 hole 0.203 mask+0.051: 17(-1,0) 17(0,1) 17(0,0) 17(0,-1) 17(1,0)
  rect 2.6x2.6 smd paste-1.287 mask+0.051: 17(0,0)
  silkscreen extent -2.17,-2.17 2.17,2.17
OPA4350 [mil]
  rect 83x16 smd: 1(-102.5,87.5) 2(-102.5,62.5) 3(-102.5,37.5) 4(-102.5,12.5) 5(-102.5,-12.5) 6(-102.5,-37.5) 7(-102.5,-62.5) 8(-102.5,-87.5) 9(102.5,-87.5) 10(102.5,-62.5) 11(102.5,-37.5) 12(102.5,-12.5) 13(102.5,12.5) 14(102.5,37.5) 15(102.5,62.5) 16(102.5,87.5)
  silkscreen extent -110,-98 164,130
REF5030 [mil]
  rect 90x24 smd: 1(-99,75) 2(-99,25) 3(-99,-25) 4(-99,-75) 5(99,-75) 6(99,-25) 7(99,25) 8(99,75)
  silkscreen extent -111,-98 48,131
RLF7030T [mm]
  rect 2x2.2 smd: 1(0,0) 2(5.9,0)
  silkscreen extent -0.74,-3.5 6.62,3.5
TMS320F28377D [mm]
  round 0.4 smd paste+0 mask+0.051: A1(-7.2,7.2) A2(-6.4,7.2) A3(-5.6,7.2) A4(-4.8,7.2) A5(-4,7.2) A6(-3.2,7.2) A7(-2.4,7.2) A8(-1.6,7.2) A9(-0.8,7.2) A10(0,7.2) A11(0.8,7.2) A12(1.6,7.2) A13(2.4,7.2) A14(3.2,7.2) A15(4,7.2) A16(4.8,7.2) A17(5.6,7.2) A18(6.4,7.2) A19(7.2,7.2) B1(-7.2,6.4) B2(-6.4,6.4) B3(-5.6,6.4) B4(-4.8,6.4) B5(-4,6.4) B6(-3.2,6.4) B7(-2.4,6.4) B8(-1.6,6.4) B9(-0.8,6.4) B10(0,6.4) B11(0.8,6.4) B12(1.6,6.4) B13(2.4,6.4) B14(3.2,6.4) B15(4,6.4) B16(4.8,6.4) B17(5.6,6.4) B18(6.4,6.4) B19(7.2,6.4) C1(-7.2,5.6) C2(-6.4,5.6) C3(-5.6,5.6) C4(-4.8,5.6) C5(-4,5.6) C6(-3.2,5.6) C7(-2.4,5.6) C8(-1.6,5.6) C9(-0.8,5.6) C10(0,5.6) C11(0.8,5.6) C12(1.6,5.6) C13(2.4,5.6) C14(3.2,5.6) C15(4,5.6) C16(4.8,5.6) C17(5.6,5.6) C18(6.4,5.6) C19(7.2,5.6) D1(-7.2,4.8) D2(-6.4,4.8) D3(-5.6,4.8) D4(-4.8,4.8) D5(-4,4.8) D6(-3.2,4.8) D7(-2.4,4.8) D8(-1.6,4.8) D9(-0.8,4.8) D10(0,4.8) D11(0.8,4.8) D12(1.6,4.8) D13(2.4,4.8) D14(3.2,4.8) D15(4,4.8) D16(4.8,4.8) D17(5.6,4.8) D18(6.4,4.8) D19(7.2,4.8) E1(-7.2,4) E2(-6.4,4) E3(-5.6,4) E4(-4.8,4) E5(-4,4) E6(-3.2,4) E7(-2.4,4) E8(-1.6,4) E9(-0.8,4) E10(0,4) E11(0.8,4) E12(1.6,4) E13(2.4,4) E14(3.2,4) E15(4,4) E16(4.8,4) E17(5.6,4) E18(6.4,4) E19(7.2,4) F1(-7.2,3.2) F2(-6.4,3.2) F3(-5.6,3.2) F4(-4.8,3.2) F5(-4,3.2) F6(-3.2,3.2) F7(-2.4,3.2) F8(-1.6,3.2) F9(-0.8,3.2) F10(0,3.2) F11(0.8,3.2) F12(1.6,3.2) F13(2.4,3.2) F14(3.2,3.2) F15(4,3.2) F16(4.8,3.2) F17(5.6,3.2) F18(6.4,3.2) F19(7.2,3.2) G1(-7.2,2.4) G2(-6.4,2.4) G3(-5.6,2.4) G4(-4.8,2.4) G5(-4,2.4) G6(-3.2,2.4) G14(3.2,2.4) G15(4,2.4) G16(4.8,2.4) G17(5.6,2.4) G18(6.4,2.4) G19(7.2,2.4) H1(-7.2,1.6) H2(-6.4,1.6) H3(-5.6,1.6) H4(-4.8,1.6) H5(-4,1.6) H6(-3.2,1.6) H8(-1.6,1.6) H9(-0.8,1.6) H10(0,1.6) H11(0.8,1.6) H12(1.6,1.6) H14(3.2,1.6) H15(4,1.6) H16(4.8,1.6) H17(5.6,1.6) H18(6.4,1.6) H19(7.2,1.6) J1(-7.2,0.8) J2(-6.4,0.8) J3(-5.6,0.8) J4(-4.8,0.8) J5(-4,0.8) J6(-3.2,0.8) J8(-1.6,0.8) J9(-0.8,0.8) J10(0,0.8) J11(0.8,0.8) J12(1.6,0.8) J14(3.2,0.8) J15(4,0.8) J16(4.8,0.8) J17(5.6,0.8) J18(6.4,0.8) J19(7.2,0.8) K1(-7.2,0) K2(-6.4,0) K3(-5.6,0) K4(-4.8,0) K5(-4,0) K6(-3.2,0) K8(-1.6,0) K9(-0.8,0) K10(0,0) K11(0.8,0) K12(1.6,0) K14(3.2,0) K15(4,0) K16(4.8,0) K17(5.6,0) K18(6.4,0) K19(7.2,0) L1(-7.2,-0.8) L2(-6.4,-0.8) L3(-5.6,-0.8) L4(-4.8,-0.8) L5(-4,-0.8) L6(-3.2,-0.8) L8(-1.6,-0.8) L9(-0.8,-0.8) L10(0,-0.8) L11(0.8,-0.8) L12(1.6,-0.8) L14(3.2,-0.8) L15(4,-0.8) L16(4.8,-0.8) L17(5.6,-0.8) L18(6.4,-0.8) L19(7.2,-0.8) M1(-7.2,-1.6) M2(-6.4,-1.6) M3(-5.6,-1.6) M4(-4.8,-1.6) M5(-4,-1.6) M6(-3.2,-1.6) M8(-1.6,-1.6) M9(-0.8,-1.6) M10(0,-1.6) M11(0.8,-1.6) M12(1.6,-1.6) M14(3.2,-1.6) M15(4,-1.6) M16(4.8,-1.6) M17(5.6,-1.6) M18(6.4,-1.6) M19(7.2,-1.6) N1(-7.2,-2.4) N2(-6.4,-2.4) N3(-5.6,-2.4) N4(-4.8,-2.4) N5(-4,-2.4) N6(-3.2,-2.4) N14(3.2,-2.4) N15(4,-2.4) N16(4.8,-2.4) N17(5.6,-2.4) N18(6.4,-2.4) N19(7.2,-2.4) P1(-7.2,-3.2) P2(-6.4,-3.2) P3(-5.6,-3.2) P4(-4.8,-3.2) P5(-4,-3.2) P6(-3.2,-3.2) P7(-2.4,-3.2) P8(-1.6,-3.2) P9(-0.8,-3.2) P10(0,-3.2) P11(0.8,-3.2) P12(1.6,-3.2) P13(2.4,-3.2) P14(3.2,-3.2) P15(4,-3.2) P16(4.8,-3.2) P17(5.6,-3.2) P18(6.4,-3.2) P19(7.2,-3.2) R1(-7.2,-4) R2(-6.4,-4) R3(-5.6,-4) R4(-4.8,-4) R5(-4,-4) R6(-3.2,-4) R7(-2.4,-4) R8(-1.6,-4) R9(-0.8,-4) R10(0,-4) R11(0.8,-4) R12(1.6,-4) R13(2.4,-4) R14(3.2,-4) R15(4,-4) R16(4.8,-4) R17(5.6,-4) R18(6.4,-4) R19(7.2,-4) T1(-7.2,-4.8) T2(-6.4,-4.8) T3(-5.6,-4.8) T4(-4.8,-4.8) T5(-4,-4.8) T6(-3.2,-4.8) T7(-2.4,-4.8) T8(-1.6,-4.8) T9(-0.8,-4.8) T10(0,-4.8) T11(0.8,-4.8) T12(1.6,-4.8) T13(2.4,-4.8) T14(3.2,-4.8) T15(4,-4.8) T16(4.8,-4.8) T17(5.6,-4.8) T18(6.4,-4.8) T19(7.2,-4.8) U1(-7.2,-5.6) U2(-6.4,-5.6) U3(-5.6,-5.6) U4(-4.8,-5.6) U5(-4,-5.6) U6(-3.2,-5.6) U7(-2.4,-5.6) U8(-1.6,-5.6) U9(-0.8,-5.6) U10(0,-5.6) U11(0.8,-5.6) U12(1.6,-5.6) U13(2.4,-5.6) U14(3.2,-5.6) U15(4,-5.6) U16(4.8,-5.6) U17(5.6,-5.6) U18(6.4,-5.6) U19(7.2,-5.6) V1(-7.2,-6.4) V2(-6.4,-6.4) V3(-5.6,-6.4) V4(-4.8,-6.4) V5(-4,-6.4) V6(-3.2,-6.4) V7(-2.4,-6.4) V8(-1.6,-6.4) V9(-0.8,-6.4) V10(0,-6.4) V11(0.8,-6.4) V12(1.6,-6.4) V13(2.4,-6.4) V14(3.2,-6.4) V15(4,-6.4) V16(4.8,-6.4) V17(5.6,-6.4) V18(6.4,-6.4) V19(7.2,-6.4) W1(-7.2,-7.2) W2(-6.4,-7.2) W3(-5.6,-7.2) W4(-4.8,-7.2) W5(-4,-7.2) W6(-3.2,-7.2) W7(-2.4,-7.2) W8(-1.6,-7.2) W9(-0.8,-7.2) W10(0,-7.2) W11(0.8,-7.2) W12(1.6,-7.2) W13(2.4,-7.2) W14(3.2,-7.2) W15(4,-7.2) W16(4.8,-7.2) W17(5.6,-7.2) W18(6.4,-7.2) W19(7.2,-7.2)
  silkscreen extent -8.15,-8.15 8.15,8.15
TPD4E001 [mm]
  rect 0.654x0.301 smd: 1(-0.65,0.5) 2(-0.65,0) 3(-0.65,-0.5) 4(0.65,-0.5) 5(0.65,0) 6(0.65,0.5)
TPS3702 [mil]
  rect 62x22 smd paste-4 mask+2: 1(-46,37.4) 2(-46,0) 3(-46,-37.4) 4(46,-37.4) 5(46,0) 6(46,37.4)
  silkscreen extent -35,-60 35,60

## Part data
C1 C2 C3 C4 C5 C6 C7 C8 C9 C10 C11 C12 C13 C14 C15 C16 C17 C19 C20 C21 C22 C23 C24 C25 C26 C27 C28 C29 C30 C31 C32 C33 C34 C35 C36 C37 C38 C39 C40 C41 C42 C43 C44 C45 C46 C47 C48 C49 C50 C51 C53 C54 C55 C56 C57 C58 C59 C60 C61 C62 C63 C64 C65 C66 C67 C85 C86 C87 C88 C89 C90 C91 C92 C93 C94 C95 C96 C97 C98 C99 C100 C101 C102 C104 C105 C106 C107 C108 C109 C110 C111 C112 C113 C114: library part CAP
JP1 JP2: "Header,36-Pin, Dual row"
JP3: "Header, 6-Pin, Dual row"
JP4: "Header, 10-Pin, Dual row"
L1 L2 L3 L4 L5 L6 L7 L8: library part "Inductor Iron", "Magnetic-Core Inductor"
L9 L10: library part "Inductor Chip", "Inductor"
LED4 LED5: "Typical Chip LED"
R1 R2 R3 R4 R5 R6 R7 R8 R9 R10 R11 R12 R14 R15 R16 R17 R18 R19 R20 R21 R44 R46 R48 R49 R50 R51 R52 R53 R54 R55 R56 R57 R58 R59 R60 R62 R63 R64 R65: library part Resistor
U3 U4 U5 U10 U11 U13 U14: "Imported"
U12: library part LM26420Q1XSQ/NOP, "Imported"
Y1: library part XTAL1

## Free pads (board coordinates)
  round 118.11 hole 118.11: 9(-984,-829) 9(853,-990) 9(863,974)

## Via types
v1: diameter 18, hole 8, Top Layer to Bottom Layer, 208 vias
v2: diameter 20, hole 10, Top Layer to Bottom Layer, 181 vias
v3: diameter 30, hole 15, Top Layer to Bottom Layer, 41 vias
v4: diameter 40, hole 20, Top Layer to Bottom Layer, 4 vias

## Nets (pads, with @x,y where several pads share a name; then routed paths per layer and width w, separated by ;. In a path a pad name is that pad's centre, name@x,y a point inside that pad or via, vN(x,y) a via of type N, cw(c..) or ccw(c..) an arc to the next point about the centre after c; other vN are vias at no path point)
1V2: C57.1 C102.1 L8.1 L10.2 R50.2 U14.3 | length 1076.8
  Top Layer w10: -922.49,105.7 v2(-872.2,156)
  Top Layer w20: L10.2@-859.99,14.72 L10.2@-859.99,42.01 ; C102.1@-673.12,44 -671,44 -596,119 -524.02,119 -458.4,53.38 L8.1@-458.4,48 C57.1@-458.4,-39.13
  Top Layer w30: R50.2@-1000.99,351.54 -1000.99,183.01 L10.2@-859.99,42.01 ; L10.2@-859.99,14.72 -702.39,14.72 C102.1@-673.12,44
  Bottom Layer w10: U14.3@-918,155.6 -872.6,155.6 v2(-872.2,156)
3V3: C50.1 C53.1 C101.1 L5.1 L6.1 L9.2 LED4.1 R48.2 | length 854.2
  Top Layer w20: -820.87,918.01 LED4.1@-719.01,918.01 ; L9.2@-819.99,818.29 -819.99,917.13 ; L6.1@-692.6,-158 v3(-692.6,-66.6) ; L6.1@-686.13,-164.46 C53.1@-604,-164.46
  Top Layer w30: R48.2@-1070.46,593 -1070.46,663.43 -915.59,818.29 L9.2@-819.99,818.29
  Bottom Layer w20: C50.1@-505,576.46 -505,629 v3(-475,659)
  other v2: -723,801 -681,802 -681,830 -722,832 -722,862 -682,862
  other v3: -736,-67
5V0: C98.1 C100.1 JP1.32 JP1.34 JP1.36 JP3.9 JP3.11 R46.1 U12.1 U12.2 U12.11 U12.12 U12.13 U12.16 | length 1743.8
  Top Layer w10: U12.13@-772.2,375.61 -751.49,375.62 C100.1@-657.99,282.13
  Top Layer w20: -684.11,604.89 C98.1@-619.01,604.89
  Top Layer w30: U12.12@-808.61,339.2 -785.2,339.2 -728.13,282.13 C100.1@-657.99,282.13 -618.54,321.58 R46.1@-618.54,413 -606,413 -564,455 -564,549.88 C98.1@-619.01,604.89 ; U12.1@-808.61,488.8 -764.19,488.81 -735,518 -735,587 -714.12,607.88 C98.1@-622,607.88
  Top Layer w40: C98.1@-622,607.88 -512,717.88 -512,1031 -451,1092 -324,1092 -323,1093
  other v3: -400,1141 -352,1141 -307,1142
/RE: JP4.19 U3.J2 | length 1155.4
  Top Layer w5: JP4.19@-348,-993 -348,-837 -281,-770 v2(-131,-770) ; v2(-3,-483) 70.52,-483 142.52,-411 226.52,-411 268.52,-369 343.54,-369 U3.J2@359.04,-384.5
  Bottom Layer w5: v2@-131,-769 -131,-705 -3,-577 v2(-3,-483)
ADCA0: JP2.3 R18.1 | length 126.8
  Bottom Layer w5: R18.1@-378,-838.59 -378,-874 -348,-904 JP2.3@-348,-953
ADCA1: JP2.6 R21.1 | length 416.3
  Bottom Layer w5: R21.1@-517,-839.59 -518,-840.59 -518,-919 -420,-1017 -329,-1017 -298,-1048 JP2.6@-298,-1111
ADCA2: JP2.5 R57.1 | length 118
  Bottom Layer w5: R57.1@-309,-839.59 -309,-879 -298,-890 JP2.5@-298,-953
ADCA3: JP2.1 R16.1 | length 134.7
  Bottom Layer w5: R16.1@-447,-838.59 -398,-887.59 JP2.1@-398,-953
ADCB2: JP2.7 R17.1 | length 116.7
  Bottom Layer w5: JP2.7@-248,-953 -248,-893 -240,-885 R17.1@-240,-839.59
ADCB3: JP2.9 R20.1 | length 124.6
  Bottom Layer w5: JP2.9@-198,-953 -198,-903 -171,-876 R20.1@-171,-839.59
ADCC2: JP4.21 R19.1 | length 407.9
  Top Layer w5: v2(-479,-1052) -408,-1052 -398,-1042 JP4.21@-398,-993
  Bottom Layer w5: R19.1@-586,-838.59 -586,-971 -504,-1053 -480,-1053 v2(-479,-1052)
ADR1: U1.25 U3.A4 | length 643.6
  Top Layer w5: U3.A4@422.5,-132.06 U3.A4@422.03,-132.53 421.5,-132.53 421.5,-46.5 436.5,-31.5 436.5,40.5 487,91 487,243 546,302 616.02,302 v2(651.01,267.01)
  Bottom Layer w5: U1.25@651.01,230.2 v2(651.01,267.01)
ADR2: U1.29 U3.T16 | length 1623
  Top Layer w5: v1(572,141) 572,136 580,128 1025,128 v1@1130.5,22.5 ; U3.T16@799.98,-604.97 801.03,-604.97 817.01,-588.99 913.99,-588.99 934,-609 1044,-609 1130,-523 v1(1130,-53)
  Bottom Layer w5: v1(572,141) 572,225.94 574,227.94 572,229.94 U1.29@572.27,230.2 ; v1(1130,-53) v1(1130,18)
ADR3: U1.26 U3.W17 | length 1739.9
  Top Layer w5: v1(631,182) 641,172 1042.48,172 1183.24,31.24 1183,31 1206,8 1206,-546.14 990.15,-761.99 894.02,-761.99 U3.W17@831.48,-699.46
  Bottom Layer w5: v1(631,182) 631.32,182.32 U1.26@631.32,230.2
ADR4: U1.27 U3.V17 | length 1688.2
  Top Layer w5: v1(612,168) 621,159 1036,159 1196,-1 1196,-542 1054.01,-683.99 851.01,-683.99 834.98,-667.96 U3.V17@831.48,-667.96
  Bottom Layer w5: U1.27@611.64,230.2 613,228.84 612,227.84 v1(612,168)
BISSC_CLK: JP4.17 U3.A6 | length 1374.8
  Top Layer w5: JP4.17@-298,-993 -297,-992 -297,-852 -255,-810 v2(-102,-810) ; v1(438,-115) 467.5,-115 U3.A6@485.02,-132.53
  Bottom Layer w5: v2(-102,-810) -102,-704 77,-525 77,-465 189,-353 189,-282 300,-171 382,-171 v1(438,-115)
BISSC_DIN: JP4.20 U3.K3 | length 1285.5
  Top Layer w5: JP4.20@-348,-1151 -348,-1076 -323,-1051 -323,-848 -266,-791 -85,-791 v2(-65,-771) ; v1(151,-440) 159,-432 374.53,-432 U3.K3@390.54,-415.99
  Bottom Layer w5: v2(-65,-771) -65,-697 -63,-697 97,-537 97,-475 132,-440 v1(151,-440)
CAN_RX: JP3.6 U3.B2 | length 1453.9
  Top Layer w5: JP3.6@-204,920 -205,919 -205,813 -162.5,770.5 46.22,770.5 183,633.72 183,313.62 345,151.62 345,-82 374.81,-111.81 374.81,-149.19 359.98,-164.02 U3.B2@359.04,-164.02
CAN_TX: JP3.8 U3.C2 | length 1507.4
  Top Layer w5: JP3.8@-254,920 -255,919 -255,813 -255,812 -193.5,750.5 37.93,750.5 163,625.43 163,305.33 325,143.33 325,-99.33 343.67,-118 343.67,-180.15 U3.C2@359.04,-195.52 U3.C2@357.54,-195.52
CAP1: JP4.12 U3.V12 | length 1314.3
  Top Layer w5: JP4.12@-148,-1151 -148,-1237 -128,-1257 179.86,-1257 317.86,-1119 485.86,-1119 575,-1029.86 575,-822 658.63,-738.37 658.63,-685.37 674,-670 U3.V12@674,-667.96
CAP2: JP4.2 U3.W10 | length 962.3
  Top Layer w5: JP4.2@102,-1151 102,-1222 114,-1234 174.57,-1234 309.57,-1099 477.57,-1099 545,-1031.57 545,-788 611.01,-721.99 U3.W10@611.01,-699.46
CAP3: JP4.14 U3.U12 | length 1424.5
  Top Layer w5: JP4.14@-198,-1151 -198,-1235 -166,-1267 184,-1267 322,-1129 490,-1129 592,-1027 592,-829 690.12,-730.88 690.12,-652.59 U3.U12@674,-636.46
CHIP_MODE0: JP1.11 R2.1 U1.48 | length 680.9
  Top Layer w5: R2.1@206,929.41 196,919.41 v2(196,831) 196,796 223,769 320.14,769 385,704.14 385,590.02 v2(420.01,555.01)
  Bottom Layer w5: v2(196,831) JP1.11@196,920 ; v2(420.01,555.01) U1.48@483.68,555.01
CHIP_MODE1: JP1.13 R3.1 U1.46 | length 752.6
  Top Layer w5: R3.1@138,929.41 146,921.41 v2(146,830) 217,759 316,759 375,700 v2(375.01,543.01)
  Bottom Layer w5: v2(146,830) JP1.13@146,920 ; v2(375.01,543.01) 402.38,515.64 U1.46@483.68,515.64
CS: U1.28 U3.U14 | length 1703.6
  Top Layer w5: v1(592,155) 602,145 1032.33,145 1155,22.33 1150,17.33 1151.33,16 v1(1153,16) ; U3.U14@736.99,-636.46 736.99,-636.01 752.01,-620.99 1050.76,-620.99 1152,-519.75 v1(1152,-77)
  Bottom Layer w5: U1.28@590.95,239.2 U1.28@591.01,239.15 ; U1.28@591.95,230.2 v1(592,155) ; v1(1152,-77) 1153,-76 v1(1153,16)
DACC: JP4.22 R58.1 | length 489.7
  Top Layer w5: v2(-476,-1079.78) -408.22,-1079.78 -398,-1090 JP4.22@-398,-1151
  Bottom Layer w5: R58.1@-655,-838.59 -655,-954 -529.67,-1079.33 -476.45,-1079.33 v2(-476,-1079.78)
DATA0: U1.17 U3.B11 | length 776
  Top Layer w5: U3.B11@642.5,-164.02 658.63,-147.9 v1(658.63,-67.37) 643.37,-67.37 579.5,-3.5 579.5,38.5 562.5,55.5 510.17,55.5 499.5,66.17 499.5,130.5 568,199 v1(809,199)
  Bottom Layer w5: U1.17@808.48,230.2 808.48,199.52 v1(809,199)
DATA1: U1.13 U3.C14 | length 922.7
  Top Layer w5: U3.C14@736.99,-195.52 v1@750.47,-209
  Bottom Layer w5: v1(752,-210) 753,-211 764,-200 940,-200 974,-166 974,-53.72 1057,29.28 1057,176.72 972.7,261.02 929.98,261.02 911,280 911,293.02 885.23,318.79 U1.13@838.01,318.79
DATA2: U1.12 U3.B14 | length 1044.4
  Top Layer w5: v1(721.01,-179.99) U3.B14@736.99,-164.02
  Bottom Layer w5: v1(721.01,-179.99) 721.01,-217.01 731,-227 776.67,-227 777.17,-226.5 790.83,-226.5 791.33,-227 836.31,-227 842.59,-220.72 933.42,-220.72 985,-169.14 985,-56.86 1067,25.14 1067,180.86 976.84,271.02 935.98,271.02 922,285 922,309.02 892.54,338.47 U1.12@838.01,338.47
DATA3: U1.35 U3.A14 | length 670.5
  Top Layer w5: v1(596,33) 646,-17 658,-17 736.99,-95.99 U3.A14@736.99,-132.53
  Bottom Layer w5: U1.35@483.68,299.1 434.1,299.1 404,269 404,170.52 541.52,33 v1(596,33)
DATA4: U1.49 U3.D15 | length 1326.3
  Top Layer w5: v1(642,-34) 656,-34 703.01,-81.01 v1(703.01,-94.99) ; U3.D15@768.49,-227.02 769.02,-227.02 784,-242 v1(784,-243)
  Bottom Layer w5: U1.49@513.2,584.54 513.2,614.2 498.4,629.01 421.15,629.01 353.5,561.36 353.5,439.78 360.4,432.89 360.4,156.74 462.64,54.5 462.98,54.5 482.5,34.98 482.5,34.64 551.14,-34 v1(642,-34) ; v1(703.01,-94.99) 703.01,-222.99 723.02,-243 v1(784,-243)
DATA5: U1.50 U3.C15 | length 1307.9
  Top Layer w5: v1(753.01,-179.99) U3.C15@768.49,-195.52
  Bottom Layer w5: U1.50@532.89,584.54 532.89,622.13 514.01,641.01 417.59,641.01 343,566.41 343,436.14 350.4,428.74 350.4,152.6 458.5,44.5 458.83,44.5 472.5,30.83 472.5,30.5 553.5,-50.5 721.5,-50.5 753.01,-82.01 v1(753.01,-179.99) v1@749.51,-176.49
DATA6: U1.36 U3.B15 | length 797
  Top Layer w5: v1(683,16) 784,-85 784,-150 769.98,-164.02 U3.B15@768.49,-164.02 U3.B15@768.49,-163.49
  Bottom Layer w5: U1.36@483.68,318.79 439.65,318.79 394,273.14 394,165.57 475.07,84.5 475.4,84.5 512.5,47.4 512.5,47.07 543.07,16.5 682.5,16.5 v1(683,16)
DATA7: U1.39 U3.A15 | length 806.8
  Top Layer w5: v1(666,0) 768.49,-102.49 U3.A15@768.49,-132.53
  Bottom Layer w5: U1.39@483.68,377.84 440.84,377.84 384,321 384,161.43 470.93,74.5 471.26,74.5 502.5,43.26 502.5,42.93 545.43,0 v1(666,0)
DATA8: U1.40 U3.C16 | length 928.4
  Top Layer w5: v1(784.01,-179.99) 784.46,-179.99 U3.C16@799.98,-195.52
  Bottom Layer w5: U1.40@483.68,397.53 445.53,397.53 374,326 374,157.28 466.78,64.5 467.12,64.5 492.5,39.12 492.5,38.78 548.28,-17 703,-17 784.01,-98.01 v1(784.01,-179.99)
DATA9: U1.19 U3.D16 | length 698.5
  Top Layer w5: v1(770,39) 866,39 936.51,-31.51 936.51,-191.49 917.01,-210.99 817.01,-210.99 800.98,-227.02 U3.D16@799.98,-227.02
  Bottom Layer w5: U1.19@769.11,230.2 769.11,39.89 v1(770,39)
DATA10: U1.23 U3.C17 | length 690.9
  Top Layer w5: v1(691,55) 725.5,20.5 869.99,20.5 926.51,-36.02 926.51,-174.49 921.01,-179.99 847.01,-179.99 U3.C17@831.48,-195.52
  Bottom Layer w5: U1.23@690.38,230.2 691,229.58 v1(691,55)
DATA11: U1.22 U3.A16 | length 406
  Top Layer w5: v1(788,-41) 788,-37.97 799.98,-49.95 U3.A16@799.98,-132.53
  Bottom Layer w5: U1.22@710.06,230.2 710.06,36.94 v1(788,-41)
DATA12: R14.2 U1.21 U3.B16 | length 656.5
  Top Layer w5: U3.B16@799.98,-164.02 816.01,-148 816.01,-94.99 v1(882.01,-28.99) 882.01,-25.01 v1@876.02,-31 ; v1(933,-3) 974.59,-3 R14.2@975,-2.59
  Bottom Layer w5: U1.21@729.75,230.2 729.75,39.92 794.17,-24.5 794.83,-24.5 799.33,-28.99 v1(882.01,-28.99) 907.01,-28.99 v1(933,-3)
DATA13: U1.16 U3.B17 | length 758.1
  Top Layer w5: v1(816.01,-179.99) 831.48,-164.52 U3.B17@831.48,-164.02
  Bottom Layer w5: v1(816.01,-179.99) 816.01,-99.99 836.01,-79.99 910.67,-79.99 911.17,-80.49 935.37,-80.49 954,-61.86 954,-45.43 1037,37.57 1037,168.43 967.42,238.02 899,238.02 877.28,259.73 U1.16@838.01,259.73
DATA14: U1.15 U3.A17 | length 696.9
  Top Layer w5: U3.A17@831.95,-132.06 U3.A17@831.48,-132.53 831.48,-117.52 844.01,-104.99 v1(846.01,-104.99)
  Bottom Layer w5: U1.15@838.01,279.42 880.6,279.42 909,251.02 968.56,251.02 1047,172.57 1047,33.43 964,-49.57 964,-66 938.01,-91.99 857.01,-91.99 846.01,-102.99 v1(846.01,-104.99)
DATA15: U1.33 U3.B18 | length 778.9
  Top Layer w5: U3.B18@862.98,-162.96 U3.B18@862.98,-164.02 879.1,-147.9 879,-147.8 v1(879,-63)
  Bottom Layer w5: U1.33@483.68,259.73 453.73,259.73 444,250 444,144.67 533.17,55.5 666.83,55.5 785.33,-63 v1(879,-63)
DC_CAL: JP1.17 U3.D1 | length 3055.2
  Top Layer w5: v1(-354,-250) -244,-360 66.24,-360 105.24,-321 151.14,-321 245.13,-227.02 U3.D1@327.54,-227.02
  Bottom Layer w5: v1(-354,-250) -425,-179 -425,201.29 -363,263.29 -363,666.71 -472,775.71 -472,1159.14 -447.14,1184 -3,1184 24,1157 24,1132.81 23.93,1132.74 23.93,1027.65 46,1005.58 JP1.17@46,920
DE: JP4.18 U3.J1 | length 1205.7
  Top Layer w5: JP4.18@-298,-1151 -298,-1077 -273,-1052 -273,-868 -236,-831 -73,-831 -37,-795 v2(-37,-771) ; v1(134,-485) 134,-433.67 146.67,-421 230.67,-421 267.17,-384.5 U3.J1@327.54,-384.5
  Bottom Layer w5: v2(-37,-771) -37,-701 134,-530 v1(134,-485)
DIGIN1: JP4.15 U3.V8 | length 1032.1
  Top Layer w5: JP4.15@-248,-993 -247,-992 -247,-905 -197,-855 v2(-82,-855) ; U3.V8@548.02,-667.96 v1(563,-682.95)
  Bottom Layer w5: v2(-82,-855) -10,-783 498,-783 563,-718 v1(563,-682.95)
DIGIN2: JP4.13 U3.U9 | length 1073.6
  Top Layer w5: JP4.13@-198,-993 -197,-992 -197,-898 -173,-874 v2(-65,-874) ; U3.U9@579.51,-636.46 579.51,-635.49 593.79,-621.21 v1(594.21,-621.21)
  Bottom Layer w5: v2(-65,-874) -63,-872 -62,-872 9,-801 501,-801 594.21,-707.79 v1(594.21,-621.21)
DIGIN3: JP4.11 U3.V10 | length 1016.2
  Top Layer w5: JP4.11@-148,-993 -148,-902 -139,-893 -50,-893 v2(-37,-880) ; U3.V10@611.01,-667.96 v1(625.97,-653)
  Bottom Layer w5: v2(-37,-880) 25,-818 507.01,-817.99 610,-715 610,-668.97 v1(625.97,-653)
DIGIN4: JP4.9 U3.V11 | length 937.4
  Top Layer w5: JP4.9@-98,-993 -98,-922 -83,-907 -35,-907 v2(-9,-881) ; v1@627.46,-683 U3.V11@642.5,-667.96
  Bottom Layer w5: v2(-9,-881) 44.01,-827.99 518.01,-827.99 627,-719 v1(627,-683)
DIGOUT1: JP4.3 U3.W16 | length 945.9
  Top Layer w5: JP4.3@52,-993 52,-908 v1(77,-883) ; U3.W16@799.98,-699.46 799.98,-740.02 800.97,-741 v1(802,-741)
  Bottom Layer w5: v1(77,-883) 101,-859 535.29,-859 597.29,-797 744,-797 v1@800.5,-740.5
DIGOUT2: JP4.1 U3.V16 | length 968.4
  Top Layer w5: JP4.1@102,-993 v2@102,-885 ; U3.V16@799.98,-667.96 v1(816,-683.98)
  Bottom Layer w5: v2(103,-884) 117,-870 541,-870 604,-807 761,-807 818.5,-749.5 818.5,-686.48 v1(816,-683.98)
DIGOUT3: JP4.7 U3.U13 | length 987.9
  Top Layer w5: JP4.7@-48,-993 -48,-935 -32,-919 -17,-919 v2(20,-882) ; U3.U13@706.46,-636.46 U3.U13@705.5,-636.46 705.5,-638.5 718.77,-651.77 v1(720.23,-651.77)
  Bottom Layer w5: v2(20,-882) 64.01,-837.99 527.01,-837.99 660,-705 660,-669 677.23,-651.77 v1(720.23,-651.77)
DIGOUT4: JP4.5 U3.U15 | length 1034.3
  Top Layer w5: JP4.5@2,-993 2,-930 48,-884 v2(49,-884) ; U3.U15@768.49,-637.49 U3.U15@768.49,-636.46 783.23,-651.21 v1(783.79,-651.21)
  Bottom Layer w5: v2(49,-884) 49,-883 83,-849 531.15,-849 594.15,-786 736,-786 782.5,-739.5 782.5,-652.5 v1(783.79,-651.21)
EEPSIZE: R4.1 R5.1 U1.45 | length 453.4
  Top Layer w5: v2(199,677) 200.41,677 R5.1@245,632.41 290,587.41 337.59,587.41 357,568 357,518.02 v2(379.06,495.95)
  Bottom Layer w5: v2(199,677) 243.59,632.41 R4.1@245,632.41 ; v2(379.06,495.95) U1.45@483.68,495.95
EESCL: R10.1 U1.43 U2.6 | length 425.8
  Top Layer w5: R10.1@309.41,292 280,292 262,310 262,452 273,463 309.6,463 v2(375,463)
  Bottom Layer w5: v2(375,463) 381.49,456.51 442.26,456.51 442.33,456.58 U1.43@483.68,456.58
EESDA: R9.1 U1.42 U2.5 | length 320.5
  Top Layer w5: U2.5@294.61,412.01 U2.5@309.6,412.01 ; R9.1@309.41,360 279,360 272,367 272,409 276,413 309.6,413 353,413 354,414 376.91,436.9 v2(377.9,436.9)
  Bottom Layer w5: v2(377.9,436.9) U1.42@483.68,436.9
EMU0: R54.1
EMU1: R55.2
EN_GATE: JP1.30 U3.A2 | length 1592.5
  Top Layer w5: v1(-229,835) -229,813.67 -175.83,760.5 42.07,760.5 173,629.57 173,309.48 335,147.48 335,-86.14 359.04,-110.18 U3.A2@359.04,-132.53 U3.A2@359.47,-132.53
  Bottom Layer w5: JP1.30@-254,1078 -254,1000 -229,975 v1(-229,835)
ERROR: U3.U19
FXLOSEN: R6.1 U1.8 | length 167.6
  Bottom Layer w5: U1.8@838.01,417.21 943.62,417.21 R6.1@987.42,461.01
FXSDA: R7.1 U1.9 | length 145.9
  Bottom Layer w5: U1.9@838.01,397.53 R7.1@983.94,397.53
FXSDB: R8.1 U1.10 | length 174.4
  Bottom Layer w5: U1.10@838.01,377.84 911.16,377.84 967.2,321.8 983.2,321.8 R8.1@987.41,326